# Altium PCB PCB1.PcbDoc (part 1 of 5)
Units mm, origin at the board's own origin, x right, y up, seen from the top; angles counter-clockwise.
Board outline 200 x 110 mm, 4 copper layers (Top Layer, Power Layer, GND Layer, Bottom Layer), stack 1.714 mm thick; 627 components, 400 nets, 2020 pads, 570 vias.
Unrouted connection lines stored in the file: 110.
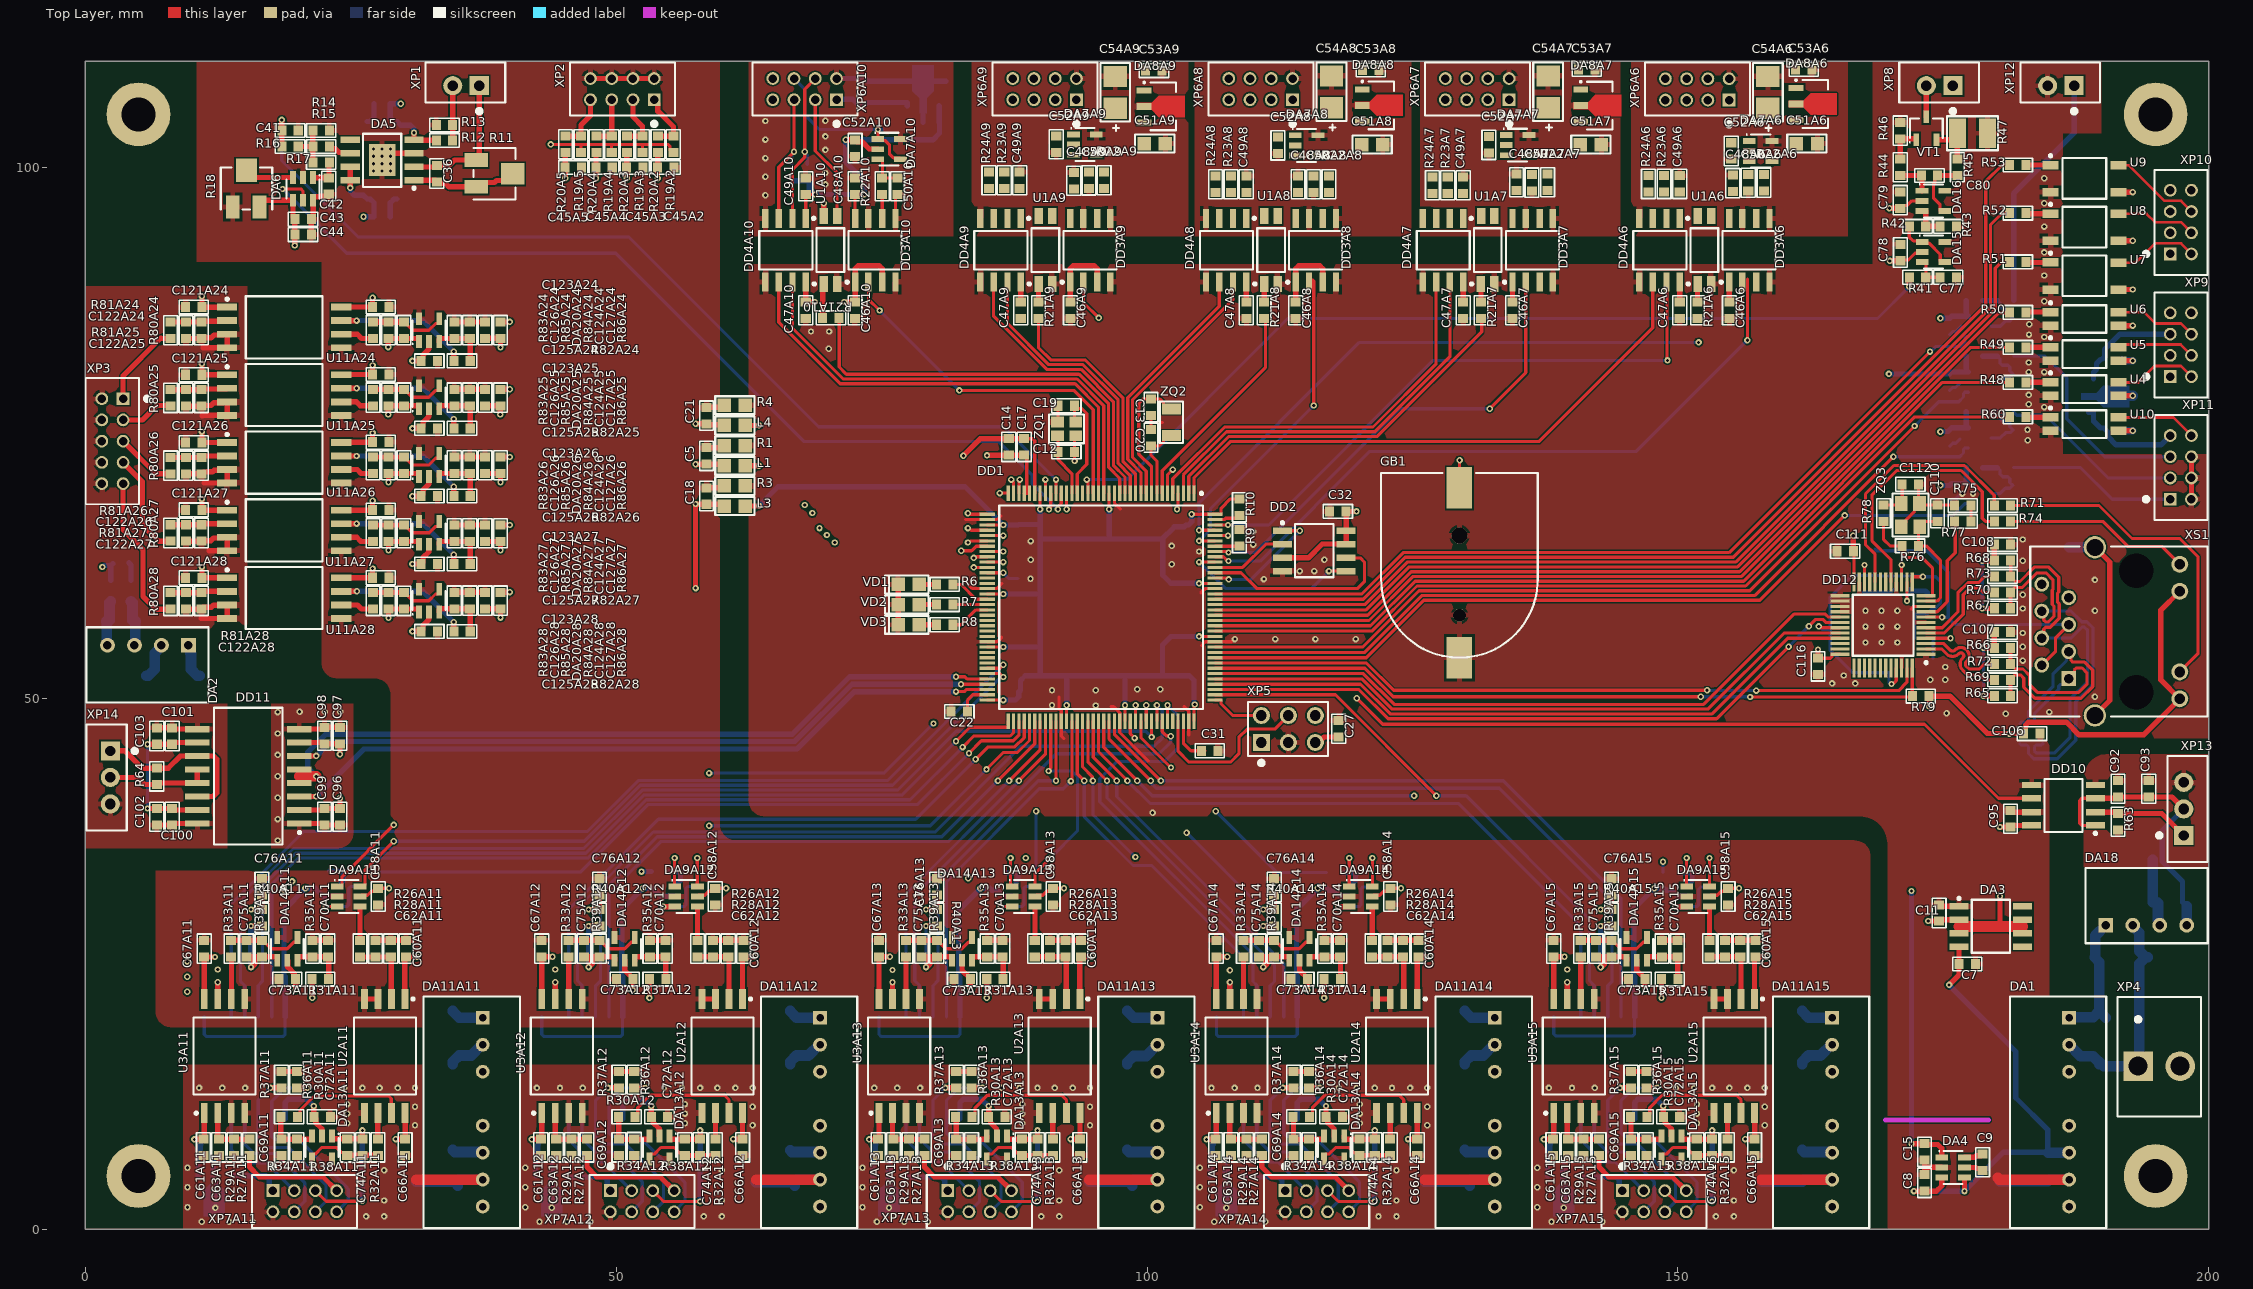
[diagram p0: Top Layer view]
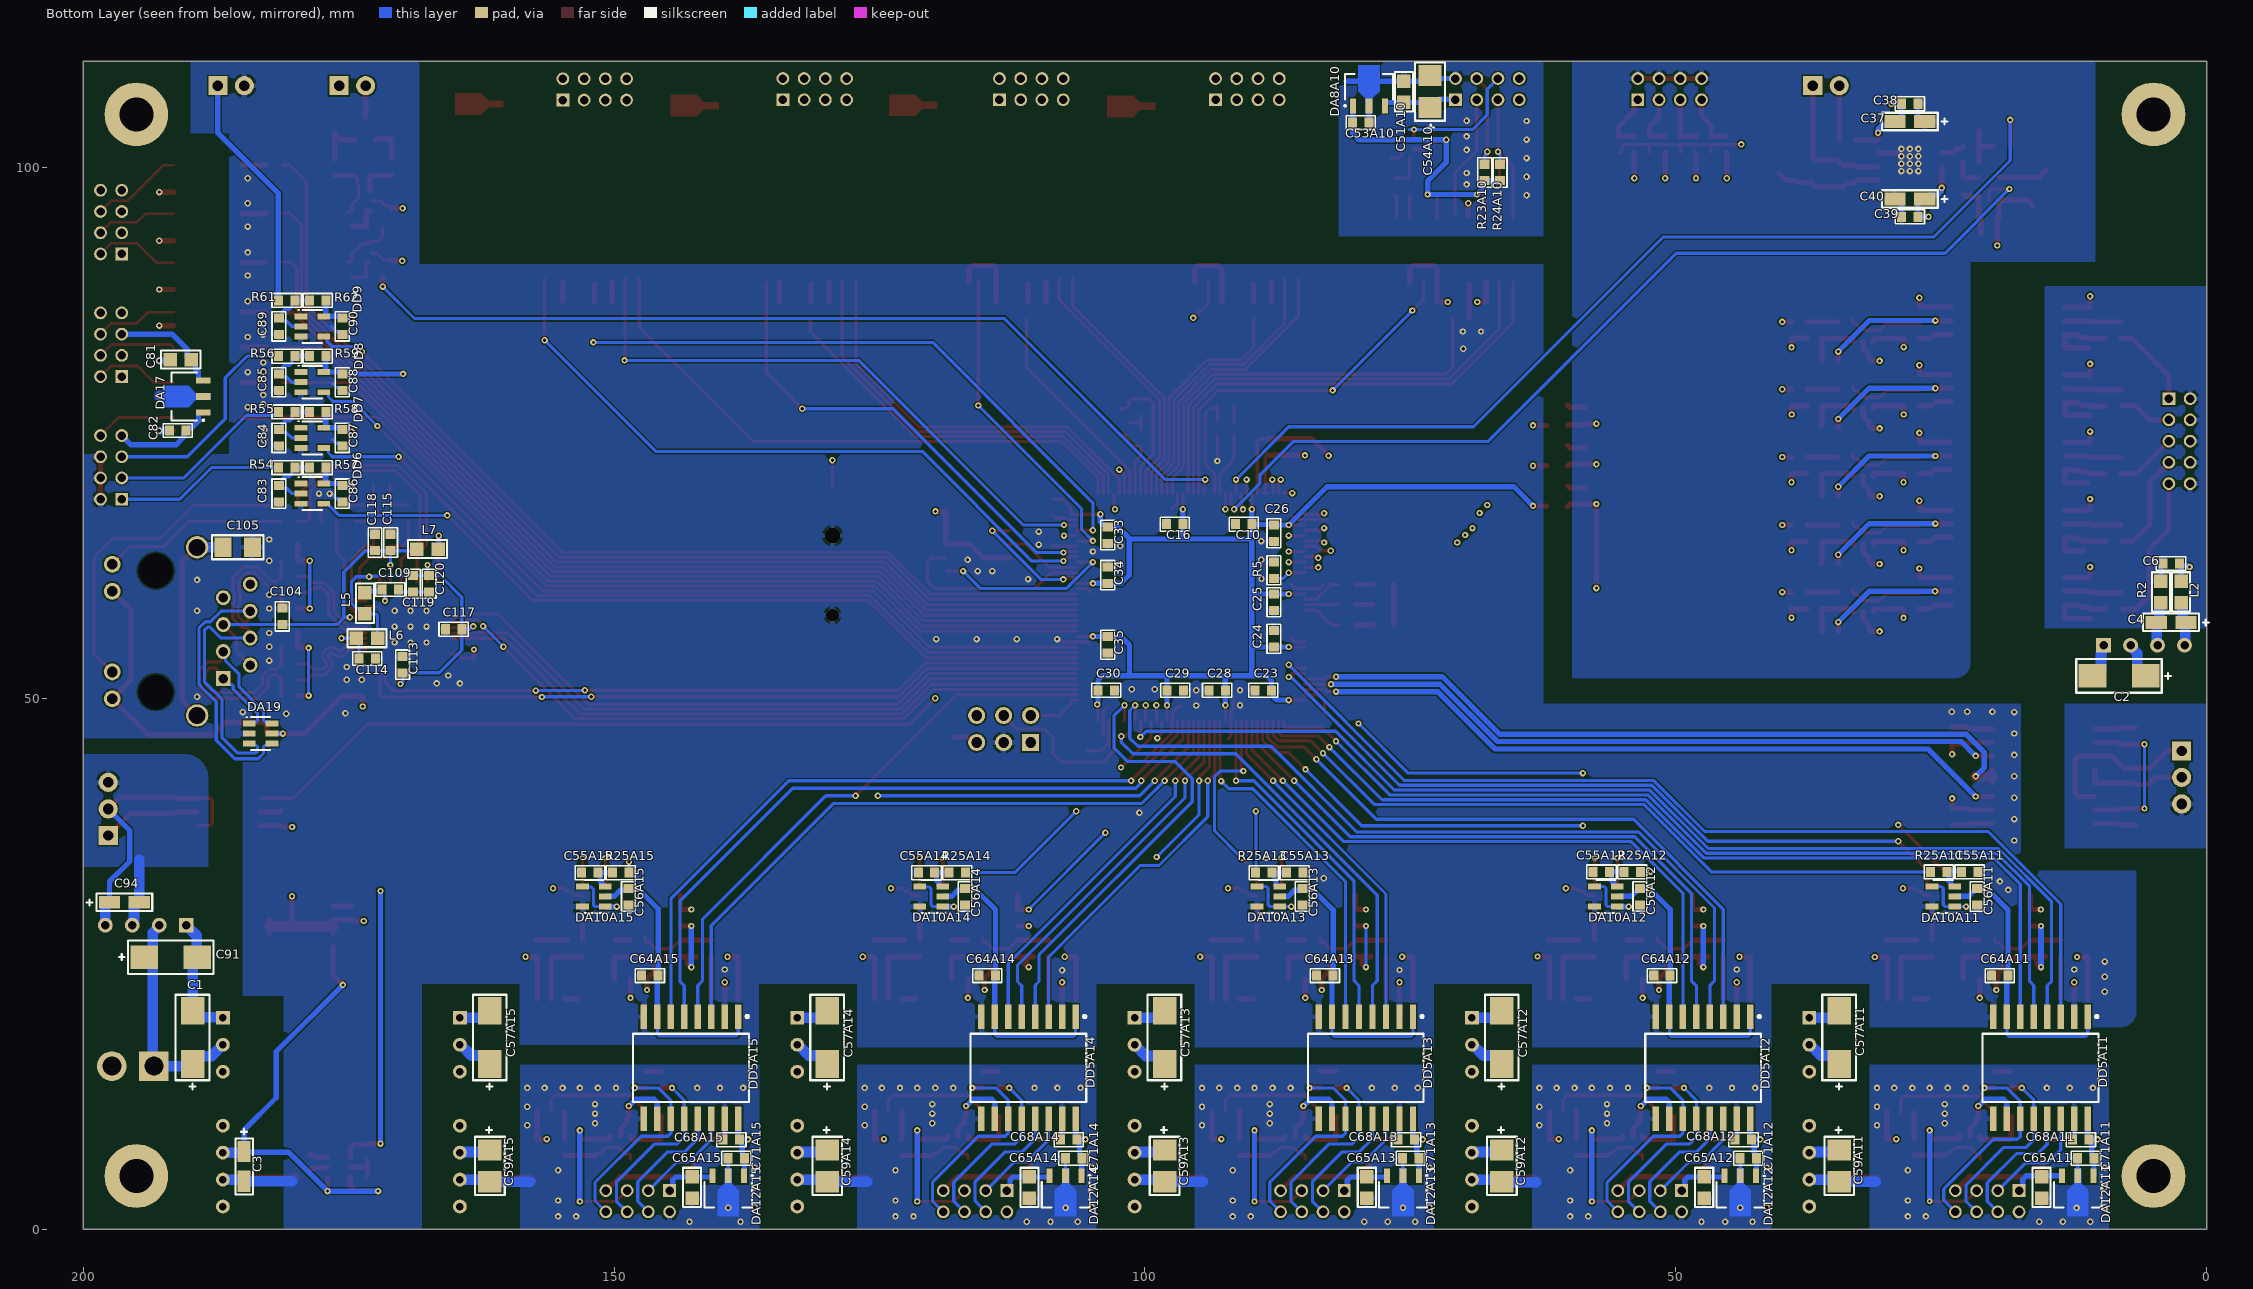
[diagram p1: Bottom Layer view, seen from below]
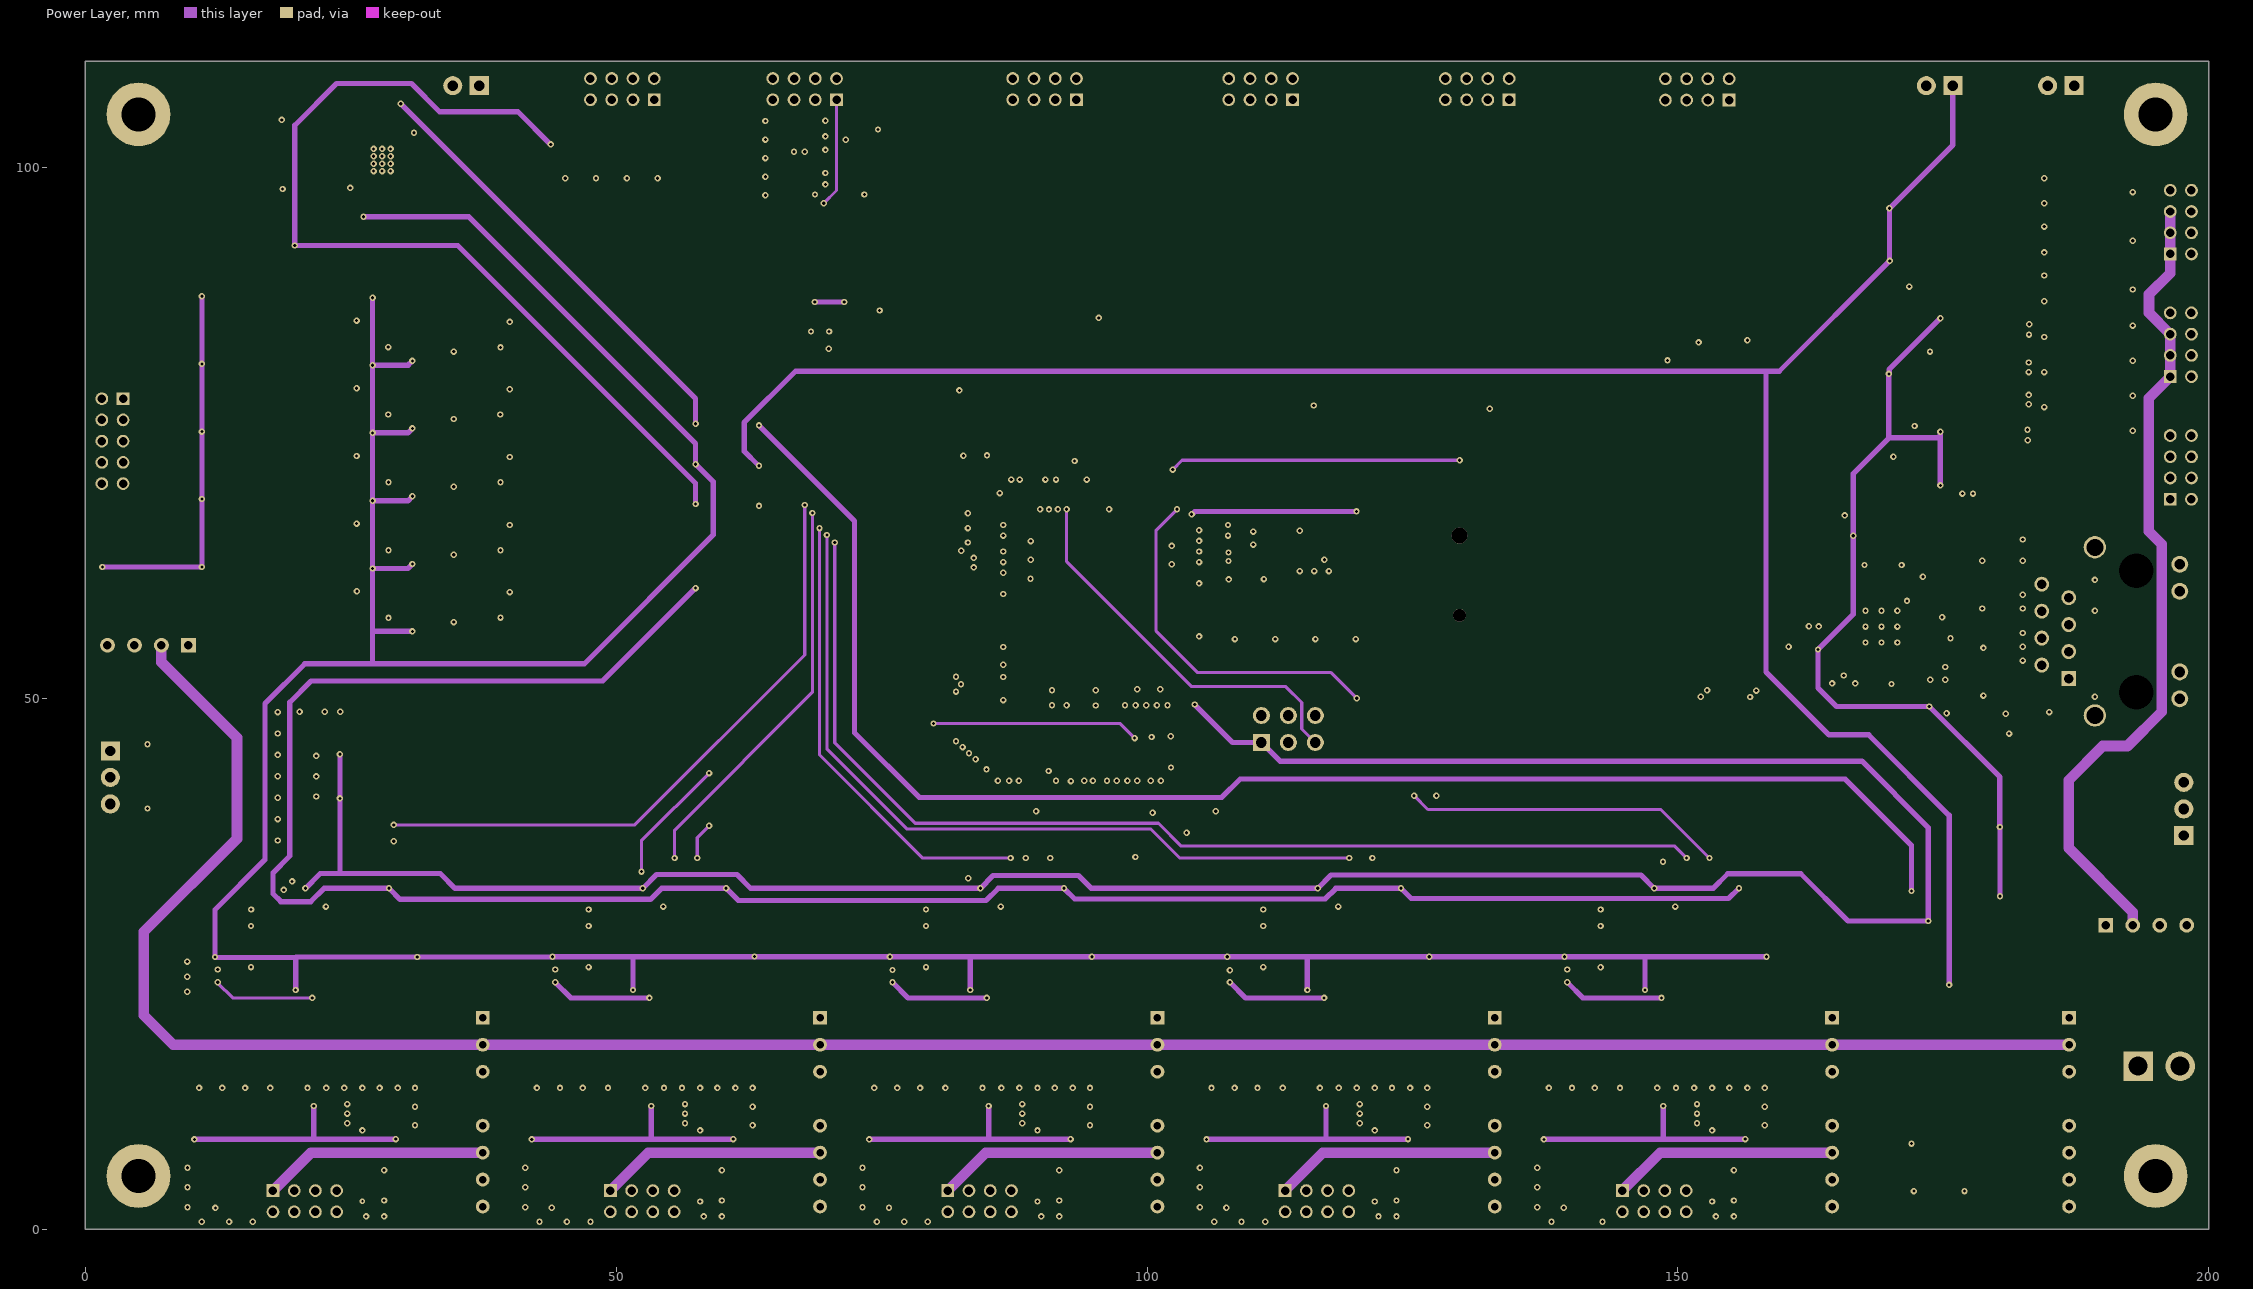
[diagram p2: Power Layer]
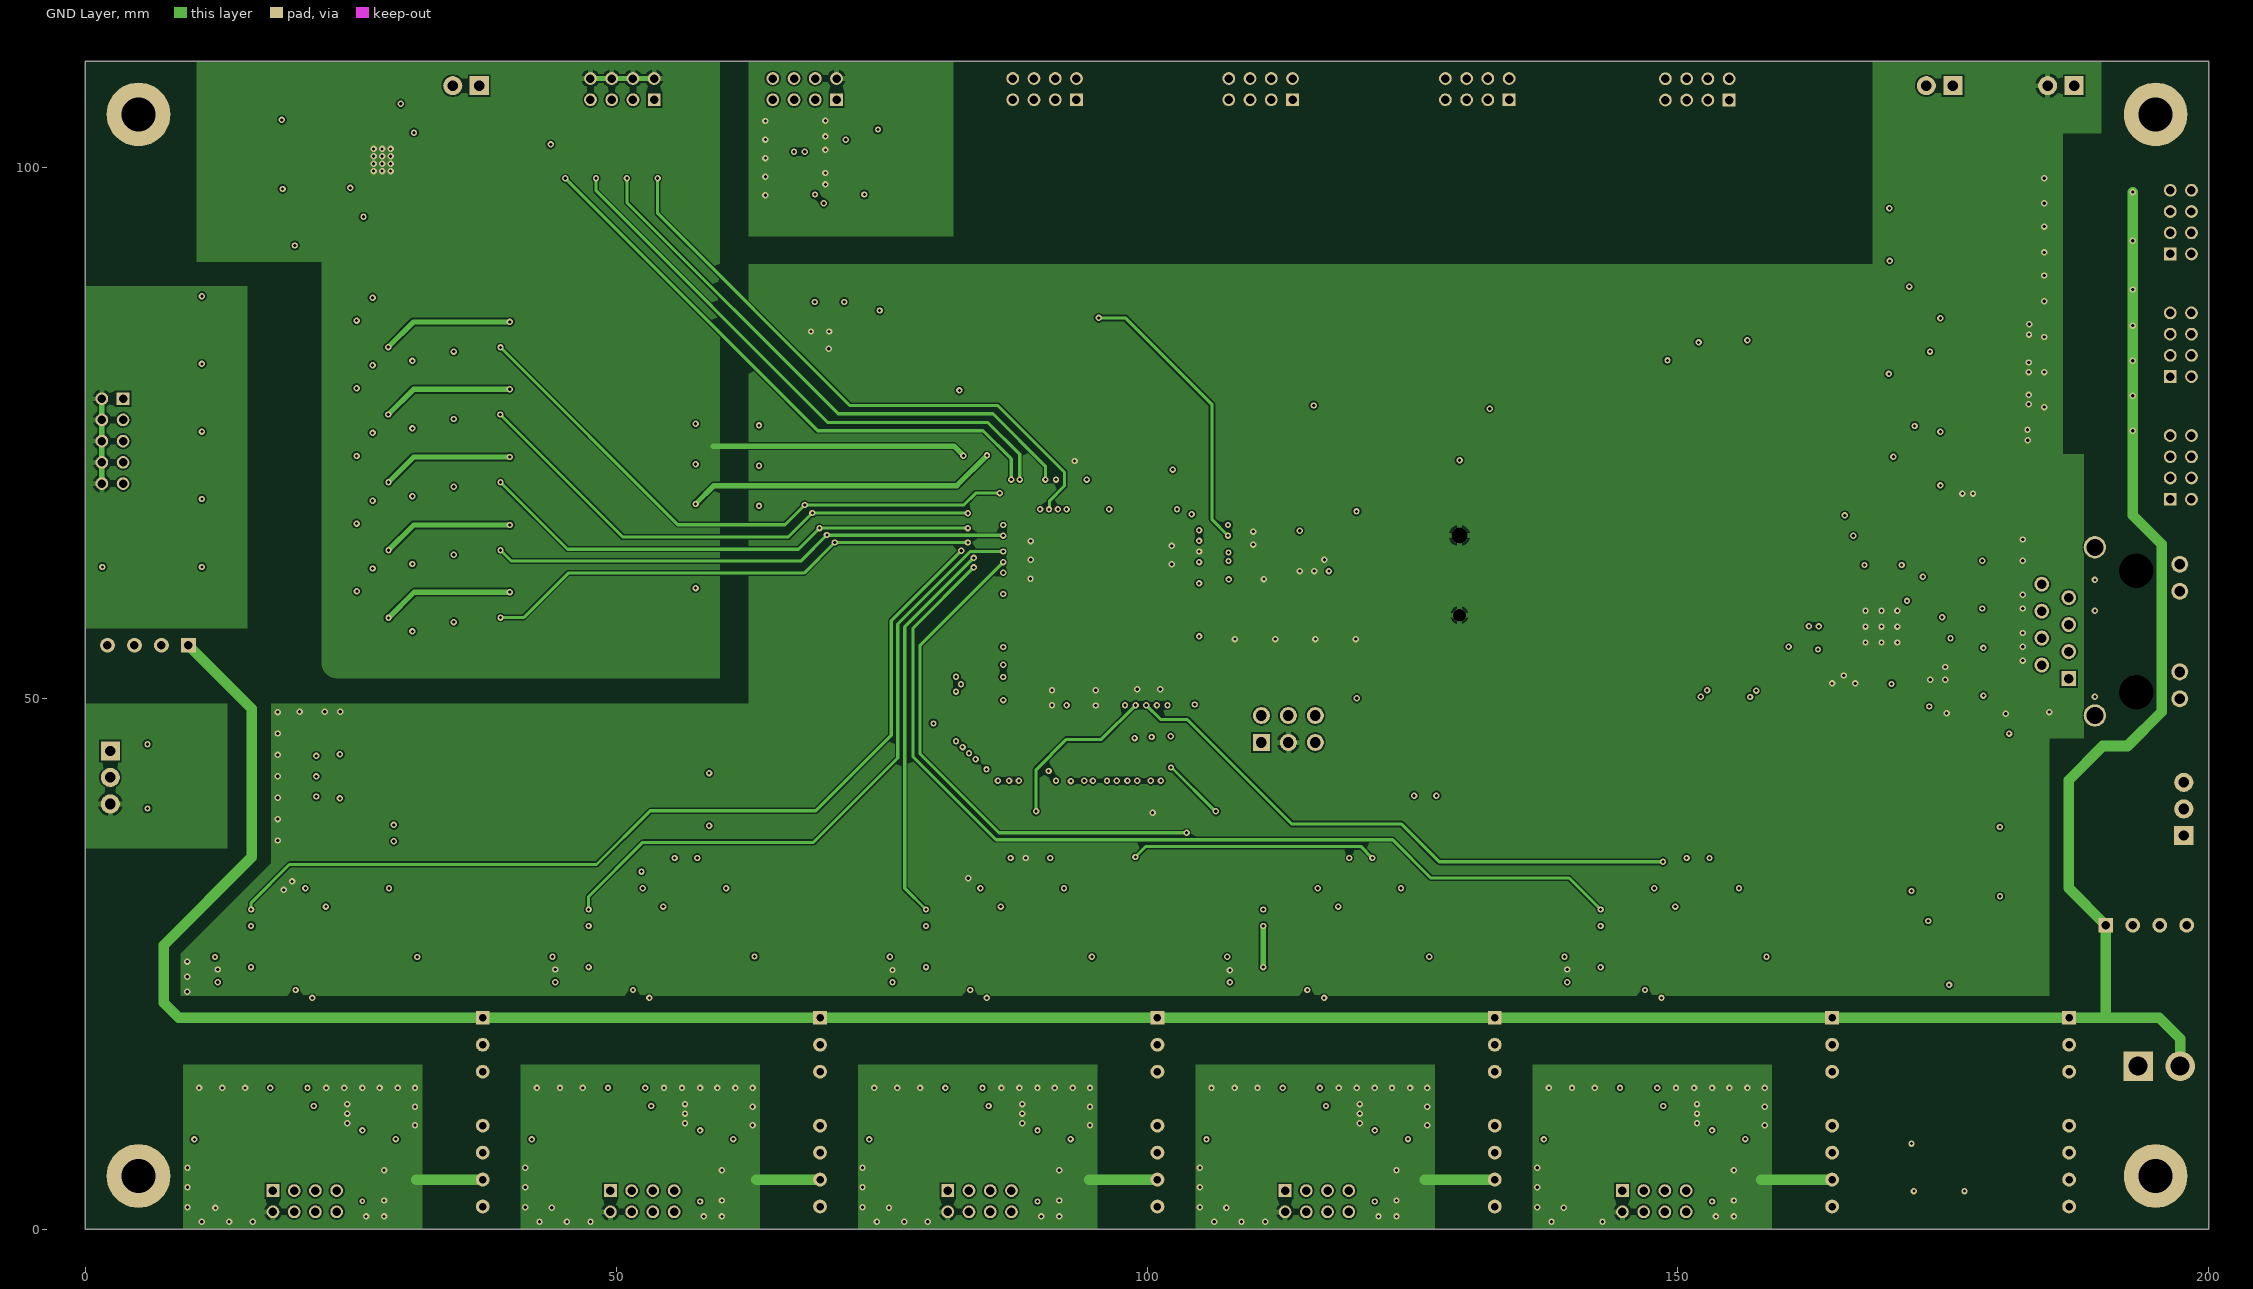
[diagram p3: GND Layer]

## Layer stack, top to bottom
Top Solder: solder mask 0.0102, Solder Resist, Dk 3.5
Top Layer: signal copper 0.018
Dielectric 1: prepreg 0.0711, PP-006, Dk 4.1
Power Layer: signal copper 0.018
Dielectric2: dielectric 1.5, FR-4, Dk 4.8
GND Layer: signal copper 0.018
Dielectric3: prepreg 0.0711, PP-006, Dk 4.1
Bottom Layer: signal copper 0.018
Bottom Solder: solder mask 0.0102, Solder Resist, Dk 3.5

## Board outline
0,0 0,110 200,110 200,0

## Design rules (kind name [scope] priority, off if disabled: settings)
BoardOutlineClearance [(OnLayer('Bottom Layer') AND OnLayer('Top Layer'))] p1: gap=0.2 ignorepadtopadclearanceinfootprint=FALSE
Clearance [All] p1: gap=0.15 ignorepadtopadclearanceinfootprint=TRUE
DiffPairsRouting [All] p1: maxlimit=0.254 minlimit=0.2 mostfreqgap=0.254 toplayer_minwidth=0.3 toplayer_maxwidth=0.381 toplayer_prefwidth=0.381 midlayer1_minwidth=0.3 midlayer1_maxwidth=0.381 midlayer1_prefwidth=0.381 midlayer2_minwidth=0.3 midlayer2_maxwidth=0.381 midlayer2_prefwidth=0.381 bottomlayer_minwidth=0.3 bottomlayer_maxwidth=0.381 bottomlayer_prefwidth=0.381 maxuncoupledlength=12.7
Height [(OnLayer('Bottom Layer'))] p1: minheight=0 maxheight=3 prefheight=3
HoleSize [All] p1: absolutevalues=TRUE maxlimit=10 minlimit=0.2 maxpercent=80.000 minpercent=20.000
MinimumSolderMaskSliver [All] p1: minsoldermaskwidth=0.04
PlaneClearance [All] p1: clearance=0.5
PlaneConnect [All] p1: planeconnectstyle=Relief reliefexpansion=0.5 reliefentries=4 reliefconductorwidth=0.25 reliefairgap=0.25
PolygonConnect [All] p1: thpad.connectstyle=Relief thpad.reliefconductorwidth=0.5 thpad.reliefentries=4 thpad.polygonreliefangle="90 Angle" thpad.airgapwidth=0.25 smdpad.connectstyle=Relief smdpad.reliefconductorwidth=0.5 smdpad.reliefentries=4 smdpad.polygonreliefangle="90 Angle" smdpad.airgapwidth=0.25 via.connectstyle=Direct via.reliefconductorwidth=0.254 via.reliefentries=4 via.polygonreliefangle="90 Angle" via.airgapwidth=0.152
RoutingCorners [All] p1: cornerstyle=Round minsetback=0.254 maxsetback=2.54
RoutingVias [All] p1: holewidth=0.2 width=0.5 viastyle="Through Hole" minholewidth=0.2 minwidth=0.5 maxholewidth=1 maxwidth=1
SilkToSilkClearance [All] p1: silktosilkclearance=0.1
SilkToSolderMaskClearance [IsPad] p1: minsilkscreentomaskgap=0 clearancetoexposedcopper=TRUE
SolderMaskExpansion [All] p1: expansion=0.102 istentingtop=FALSE
Width [All] p1: maxlimit=1 minlimit=0.2 preferedwidth=0.3 minimp=50.000000 maximp=50.000000 favimp=50.000000
21 further rules are at their usual default settings.

## Classes and differential pairs
differential pair class TD: TXO
differential pair class RD: RXI
channel class Thermistor: A2 A3 A4 A5
channel class Power_supply: A6 A7 A8 A9 A10
channel class LD_driver: A11 A12 A13 A14 A15
channel class Analog_isolation: A24 A25 A26 A27 A28
component class Main: C1 C2 C3 C4 C5 C6 C7 C8 C9 C10 C11 C12 C13 C14 C15 C16 C17 C18 C19 C20 C21 C22 C23 C24 C25 C26 C27 C28 C29 C30 C31 C32 C33 C34 C35 DA1 DA2 DA3 DA4 DD1 DD2 GB1 L1 L2 L3 L4 R1 R2 R3 R4 R5 R6 R7 R8 R9 R10 VD1 VD2 VD3 XP1 XP2 XP3 XP4 XP5 ZQ1 ZQ2
component class A28: C122A28 C124A28 C126A28 C127A28 DA20A28 R82A28 R85A28 R86A28 U11A28
component class A27: C121A27 C125A27 C126A27 C127A27 DA20A27 R81A27 R83A27 R85A27 R86A27 U11A27
component class A26: C124A26 C126A26 C127A26 DA20A26 R82A26 R85A26 R86A26 U11A26
component class A25: C121A25 C125A25 C126A25 C127A25 DA20A25 R81A25 R83A25 R85A25 R86A25 U11A25
component class A24: C124A24 C126A24 C127A24 DA20A24 R82A24 R85A24 R86A24 U11A24
component class A23: C104 C106 C109 C112 C115 C117 C120 DA19 DD12 L5 L6 L7 R65 R67 R73 R76 R79 XS1 ZQ3
component class A22: C99 C104 DD11 R65 XP14
component class A21: C92 C95 DA18 DD10 R65 XP13
component class A20: C89 C92 DD9 R61 R65 XP12
component class A19: C81 C85 C89 DA17 DD6 DD7 DD8 R61 U10 XP11
component class A18: R52 R61 U7 U8 U9 XP10
component class A17: R48 R50 U4 U5 U6 XP9
component class A16: C77 C81 DA15 DA16 R42 R46 R48 VT1 XP8
component class A15: C55A15 C56A15 C57A15 C58A15 C59A15 C60A15 C61A15 C62A15 C63A15 C64A15 C65A15 C66A15 C67A15 C68A15 C69A15 C70A15 C71A15 C72A15 C73A15 C74A15 C75A15 C76A15 DA9A15 DA10A15 DA11A15 DA12A15 DA13A15 DA14A15 DD5A15 R25A15 R26A15 R27A15 R28A15 R29A15 R30A15 R31A15 R32A15 R33A15 R34A15 R35A15 R36A15 R37A15 R38A15 R39A15 R40A15 U2A15 U3A15 XP7A15
component class A14: C55A14 C56A14 C57A14 C58A14 C59A14 C60A14 C61A14 C62A14 C63A14 C64A14 C65A14 C66A14 C67A14 C68A14 C69A14 C70A14 C71A14 C72A14 C73A14 C74A14 C75A14 C76A14 DA9A14 DA10A14 DA11A14 DA12A14 DA13A14 DA14A14 DD5A14 R25A14 R26A14 R27A14 R28A14 R29A14 R30A14 R31A14 R32A14 R33A14 R34A14 R35A14 R36A14 R37A14 R38A14 R39A14 R40A14 U2A14 U3A14 XP7A14
component class A13: C55A13 C56A13 C57A13 C58A13 C59A13 C60A13 C61A13 C62A13 C63A13 C64A13 C65A13 C66A13 C67A13 C68A13 C69A13 C70A13 C71A13 C72A13 C73A13 C74A13 C75A13 C76A13 DA9A13 DA10A13 DA11A13 DA12A13 DA13A13 DA14A13 DD5A13 R25A13 R26A13 R27A13 R28A13 R29A13 R30A13 R31A13 R32A13 R33A13 R34A13 R35A13 R36A13 R37A13 R38A13 R39A13 R40A13 U2A13 U3A13 XP7A13
component class A12: C55A12 C56A12 C57A12 C58A12 C59A12 C60A12 C61A12 C62A12 C63A12 C64A12 C65A12 C66A12 C67A12 C68A12 C69A12 C70A12 C71A12 C72A12 C73A12 C74A12 C75A12 C76A12 DA9A12 DA10A12 DA11A12 DA12A12 DA13A12 DA14A12 DD5A12 R25A12 R26A12 R27A12 R28A12 R29A12 R30A12 R31A12 R32A12 R33A12 R34A12 R35A12 R36A12 R37A12 R38A12 R39A12 R40A12 U2A12 U3A12 XP7A12
component class A11: C55A11 C56A11 C57A11 C58A11 C59A11 C60A11 C61A11 C62A11 C63A11 C64A11 C65A11 C66A11 C67A11 C68A11 C69A11 C70A11 C71A11 C72A11 C73A11 C74A11 C75A11 C76A11 DA9A11 DA10A11 DA11A11 DA12A11 DA13A11 DA14A11 DD5A11 R25A11 R26A11 R27A11 R28A11 R29A11 R30A11 R31A11 R32A11 R33A11 R34A11 R35A11 R36A11 R37A11 R38A11 R39A11 R40A11 U2A11 U3A11 XP7A11
component class A10: C46A10 C47A10 C48A10 C49A10 C50A10 C51A10 C52A10 C53A10 C54A10 DA7A10 DA8A10 DD3A10 DD4A10 R21A10 R22A10 R23A10 R24A10 U1A10 XP6A10
component class A9: C46A9 C47A9 C48A9 C49A9 C50A9 C51A9 C52A9 C53A9 C54A9 DA7A9 DA8A9 DD3A9 DD4A9 R21A9 R22A9 R23A9 R24A9 U1A9 XP6A9
component class A8: C46A8 C47A8 C48A8 C49A8 C50A8 C51A8 C52A8 C53A8 C54A8 DA7A8 DA8A8 DD3A8 DD4A8 R21A8 R22A8 R23A8 R24A8 U1A8 XP6A8
component class A7: C46A7 C47A7 C48A7 C49A7 C50A7 C51A7 C52A7 C53A7 C54A7 DA7A7 DA8A7 DD3A7 DD4A7 R21A7 R22A7 R23A7 R24A7 U1A7 XP6A7
component class A6: C46A6 C47A6 C48A6 C49A6 C50A6 C51A6 C52A6 C53A6 C54A6 DA7A6 DA8A6 DD3A6 DD4A6 R21A6 R22A6 R23A6 R24A6 U1A6 XP6A6
component class A5: C45A5 R19A5 R20A5
component class A4: C45A4 R19A4 R20A4
component class A3: C45A3 R19A3 R20A3
component class A2: C45A2 R19A2 R20A2
component class A1: C36 C37 C38 C39 C40 C41 C42 C43 C44 DA5 DA6 R11 R12 R13 R14 R15 R16 R17 R18
differential pair TXO: +TXO_P -TXO_N
differential pair TD: +TD_P -TD_N
differential pair RXI: +RXI_P -RXI_N
differential pair RD: +RD_P -RD_N

## Components (designator, comment, footprint, x,y, rotation, side; value= is the part's Value field where it differs from the comment)
C1 "10мкФх35B" CAP_C 189.7,15.55 r90 bottom locked
C2 "10мкФх35B" CAP_C 5.75,52.119 r0 bottom
C3 "10мкФх10B" CAP_A 184.85,7.3 r270 bottom
C4 "10мкФх10B" CAP_A 1.95,57.144 r0 bottom
C5 "0,1мкФ" CAP_0603 58.5,72.025 r90 top
C6 "0,1мкФ" CAP_0603 2.55,62.694 r0 bottom
C7 "0,1мкФ" CAP_0603 178.05,24.975 r180 top
C8 "10мкФ" CAP_0603 173.225,3.55 r90 top
C9 "1мкФ" CAP_0603 178.7,5.5 r90 top
C10 "0,1мкФ" CAP_0603 89.9,66.4 r0 bottom
C11 "10мкФ" CAP_0603 174.6,28.975 r90 top
C12 "8пФ" CAP_0603 91.6,73.2 r0 top
C13 "18пФ" CAP_0603 100.375,78.225 r270 top
C14 "0,1мкФ" CAP_0603 86.975,74.475 r270 top
C15 "10мкФ" CAP_0603 173.225,8.075 r270 top
C16 "0,1мкФ" CAP_0603 98,66.4 r180 bottom
C17 "0,1мкФ" CAP_0603 88.425,74.475 r270 top
C18 "0,1мкФ" CAP_0603 58.5,68.25 r90 top
C19 "8пФ" CAP_0603 93.2,77.55 r180 top
C20 "18пФ" CAP_0603 100.375,73.75 r90 top
C21 "0,1мкФ" CAP_0603 58.5,75.825 r90 top
C22 "2,2мкФ" CAP_0603 83.125,48.75 r180 top
C23 "0,1мкФ" CAP_0603 89.65,50.75 r180 bottom
C24 "0,1мкФ" CAP_0603 87.85,54.8 r90 bottom
C25 "0,1мкФ" CAP_0603 87.85,59.85 r270 bottom
C26 "0,1мкФ" CAP_0603 87.85,66.35 r270 bottom
C27 "0,1мкФ" CAP_0603 118.05,46.325 r90 top
C28 "0,1мкФ" CAP_0603 94,50.75 r180 bottom
C29 "0,1мкФ" CAP_0603 96.35,50.75 r0 bottom
C30 "0,1мкФ" CAP_0603 102.85,50.75 r0 bottom
C31 "2,2мкФ" CAP_0603 105.1,45.05 r0 top
C32 "0,1мкФ" CAP_0603 118.775,67.6 r180 top
C33 "0,1мкФ" CAP_0603 103.5,64.575 r90 bottom
C34 "0,1мкФ" CAP_0603 103.5,60.8 r90 bottom
C35 "0,1мкФ" CAP_0603 103.5,55.85 r270 bottom
C36 "22пФ" CAP_0603 33.1,98.625 r90 top
C37 "10мкФх10B" CAP_A 26.55,104.325 r0 bottom
C38 "0,1мкФ" CAP_0603 28.75,106 r180 bottom
C39 "0,1мкФ" CAP_0603 27.15,95.35 r0 bottom
C40 "10мкФх10B" CAP_A 26.55,97.025 r0 bottom
C41 "0,1мкФ" CAP_0603 18.475,103.475 r0 top
C42 "22пФ" CAP_0603 22.925,99.05 r270 top
C43 "0,1мкФ" CAP_0603 19.7,95.125 r0 top
C44 "2,2мкФ" CAP_0603 19.7,93.675 r0 top
C45A2 "0,1мкФ" CAP_0603 53.85,100 r0 top (schematic designator C45)
C45A3 "0,1мкФ" CAP_0603 50.95,100 r0 top (schematic designator C45)
C45A4 "0,1мкФ" CAP_0603 48.05,100 r0 top (schematic designator C45)
C45A5 "0,1мкФ" CAP_0603 45.15,100 r0 top (schematic designator C45)
C46A6 "0,1мкФ" CAP_0603 154.85,87.35 r270 top (schematic designator C46)
C46A7 "0,1мкФ" CAP_0603 134.425,87.35 r270 top (schematic designator C46)
C46A8 "0,1мкФ" CAP_0603 114,87.35 r270 top (schematic designator C46)
C46A9 "0,1мкФ" CAP_0603 92.775,87.35 r270 top (schematic designator C46)
C46A10 "0,1мкФ" CAP_0603 72.5,87.35 r270 top (schematic designator C46)
C47A6 "0,1мкФ" CAP_0603 150.175,87.35 r270 top (schematic designator C47)
C47A7 "0,1мкФ" CAP_0603 129.775,87.35 r270 top (schematic designator C47)
C47A8 "0,1мкФ" CAP_0603 109.35,87.35 r270 top (schematic designator C47)
C47A9 "0,1мкФ" CAP_0603 88.1,87.35 r270 top (schematic designator C47)
C47A10 "0,1мкФ" CAP_0603 67.85,87.35 r270 top (schematic designator C47)
C48A6 "0,1мкФ" CAP_0603 155.175,97.725 r90 top (schematic designator C48)
C48A7 "0,1мкФ" CAP_0603 134.8,97.8 r90 top (schematic designator C48)
C48A8 "0,1мкФ" CAP_0603 114.225,97.625 r90 top (schematic designator C48)
C48A9 "0,1мкФ" CAP_0603 93.1,97.95 r90 top (schematic designator C48)
C48A10 "0,1мкФ" CAP_0603 72.5,97.425 r90 top (schematic designator C48)
C49A6 "0,1мкФ" CAP_0603 150.175,97.65 r90 top (schematic designator C49)
C49A7 "0,1мкФ" CAP_0603 129.775,97.525 r90 top (schematic designator C49)
C49A8 "0,1мкФ" CAP_0603 109.35,97.625 r90 top (schematic designator C49)
C49A9 "0,1мкФ" CAP_0603 88,98 r90 top (schematic designator C49)
C49A10 "0,1мкФ" CAP_0603 67.85,97.425 r90 top (schematic designator C49)
C50A6 "1мкФ" CAP_0603 156.625,99.35 r270 top (schematic designator C50)
C50A7 "1мкФ" CAP_0603 136.25,99.375 r270 top (schematic designator C50)
C50A8 "1мкФ" CAP_0603 115.675,99.225 r270 top (schematic designator C50)
C50A9 "1мкФ" CAP_0603 94.525,99.575 r270 top (schematic designator C50)
C50A10 "1мкФ" CAP_0603 76.5,99.025 r270 top (schematic designator C50)
C51A6 "0,33мкФ" CAP_0805 163.15,102.25 r180 top (schematic designator C51)
C51A7 "0,33мкФ" CAP_0805 142.8,102.15 r180 top (schematic designator C51)
C51A8 "0,33мкФ" CAP_0805 122.2,102.15 r180 top (schematic designator C51)
C51A9 "0,33мкФ" CAP_0805 101.725,102.25 r180 top (schematic designator C51)
C51A10 "0,33мкФ" CAP_0805 75.6,108.125 r270 bottom (schematic designator C51)
C52A6 "0,1мкФ" CAP_0603 155.025,102.35 r270 top (schematic designator C52)
C52A7 "0,1мкФ" CAP_0603 132.2,102.925 r270 top (schematic designator C52)
C52A8 "0,1мкФ" CAP_0603 112.325,102.875 r270 top (schematic designator C52)
C52A9 "0,1мкФ" CAP_0603 91.45,102.975 r270 top (schematic designator C52)
C52A10 "0,1мкФ" CAP_0603 72.5,102.625 r270 top (schematic designator C52)
C53A6 "0,1мкФ" CAP_0603 161.05,109.225 r0 top (schematic designator C53)
C53A7 "0,1мкФ" CAP_0603 140.625,109.225 r0 top (schematic designator C53)
C53A8 "0,1мкФ" CAP_0603 120.275,109.175 r0 top (schematic designator C53)
C53A9 "0,1мкФ" CAP_0603 99.85,109.125 r0 top (schematic designator C53)
C53A10 "0,1мкФ" CAP_0603 80.475,104.225 r180 bottom (schematic designator C53)
C54A6 "10мкФх25B" CAP_B 158.475,105.575 r90 top (schematic designator C54)
C54A7 "10мкФх25B" CAP_B 137.775,105.625 r90 top (schematic designator C54)
C54A8 "10мкФх25B" CAP_B 117.375,105.625 r90 top (schematic designator C54)
C54A9 "10мкФх25B" CAP_B 97,105.575 r90 top (schematic designator C54)
C54A10 "10мкФх25B" CAP_B 73.15,105.65 r90 bottom (schematic designator C54)
C55A11 "10нФ" CAP_0603 23.125,33.65 r180 bottom (schematic designator C55)
C55A12 "10нФ" CAP_0603 56.2,33.65 r0 bottom (schematic designator C55)
C55A13 "10нФ" CAP_0603 86.7,33.575 r180 bottom (schematic designator C55)
C55A14 "10нФ" CAP_0603 119.775,33.575 r0 bottom (schematic designator C55)
C55A15 "10нФ" CAP_0603 151.475,33.575 r0 bottom (schematic designator C55)
C56A11 "0,1мкФ" CAP_0603 21.6,32.125 r270 bottom (schematic designator C56)
C56A12 "0,1мкФ" CAP_0603 53.375,32.125 r270 bottom (schematic designator C56)
C56A13 "0,1мкФ" CAP_0603 85.175,32.125 r270 bottom (schematic designator C56)
C56A14 "0,1мкФ" CAP_0603 116.95,32.125 r270 bottom (schematic designator C56)
C56A15 "0,1мкФ" CAP_0603 148.65,32.125 r270 bottom (schematic designator C56)
C57A11 "10мкФх35B" CAP_C 34.6,15.55 r90 bottom (schematic designator C57)
C57A12 "10мкФх35B" CAP_C 66.375,15.55 r90 bottom locked (schematic designator C57)
C57A13 "10мкФх35B" CAP_C 98.15,15.55 r90 bottom locked (schematic designator C57)
C57A14 "10мкФх35B" CAP_C 129.925,15.55 r90 bottom locked (schematic designator C57)
C57A15 "10мкФх35B" CAP_C 161.7,15.55 r90 bottom locked (schematic designator C57)
C58A11 "0,1мкФ" CAP_0603 27.575,32.125 r270 top (schematic designator C58)
C58A12 "0,1мкФ" CAP_0603 59.325,32.125 r270 top (schematic designator C58)
C58A13 "0,1мкФ" CAP_0603 91.15,32.125 r270 top (schematic designator C58)
C58A14 "0,1мкФ" CAP_0603 122.925,32.125 r270 top (schematic designator C58)
C58A15 "0,1мкФ" CAP_0603 154.725,32.125 r270 top (schematic designator C58)
C59A11 "10мкФх25B" CAP_B 34.6,7.45 r270 bottom locked (schematic designator C59)
C59A12 "10мкФх25B" CAP_B 66.375,7.45 r270 bottom locked (schematic designator C59)
C59A13 "10мкФх25B" CAP_B 98.15,7.45 r270 bottom locked (schematic designator C59)
C59A14 "10мкФх25B" CAP_B 129.925,7.45 r270 bottom locked (schematic designator C59)
C59A15 "10мкФх25B" CAP_B 161.7,7.45 r270 bottom locked (schematic designator C59)
C60A11 "0,1мкФ" CAP_0603 30.215,25.625 r90 top (schematic designator C60)
C60A12 "0,1мкФ" CAP_0603 62,25.625 r90 top (schematic designator C60)
C60A13 "0,1мкФ" CAP_0603 93.775,25.625 r90 top (schematic designator C60)
C60A14 "0,1мкФ" CAP_0603 125.55,25.625 r90 top (schematic designator C60)
C60A15 "0,1мкФ" CAP_0603 157.325,25.625 r90 top (schematic designator C60)
C61A11 "0,1мкФ" CAP_0603 11.115,8.5 r270 top (schematic designator C61)
C61A12 "0,1мкФ" CAP_0603 42.9,8.5 r270 top (schematic designator C61)
C61A13 "0,1мкФ" CAP_0603 74.675,8.5 r270 top (schematic designator C61)
C61A14 "0,1мкФ" CAP_0603 106.45,8.5 r270 top (schematic designator C61)
C61A15 "0,1мкФ" CAP_0603 138.225,8.5 r270 top (schematic designator C61)
C62A11 "100пФ" CAP_0603 28.765,27.225 r270 top (schematic designator C62)
C62A12 "100пФ" CAP_0603 60.55,27.225 r270 top (schematic designator C62)
C62A13 "100пФ" CAP_0603 92.325,27.225 r270 top (schematic designator C62)
C62A14 "100пФ" CAP_0603 124.1,27.225 r270 top (schematic designator C62)
C62A15 "100пФ" CAP_0603 155.875,27.225 r270 top (schematic designator C62)
C63A11 "100пФ" CAP_0603 12.565,6.9 r90 top (schematic designator C63)
C63A12 "100пФ" CAP_0603 44.35,6.9 r90 top (schematic designator C63)
C63A13 "100пФ" CAP_0603 76.125,6.9 r90 top (schematic designator C63)
C63A14 "100пФ" CAP_0603 107.9,6.9 r90 top (schematic designator C63)
C63A15 "100пФ" CAP_0603 139.675,6.9 r90 top (schematic designator C63)
C64A11 "0,1мкФ" CAP_0603 18.675,23.875 r0 bottom (schematic designator C64)
C64A12 "0,1мкФ" CAP_0603 50.5,23.875 r0 bottom (schematic designator C64)
C64A13 "0,1мкФ" CAP_0603 82.25,23.875 r0 bottom (schematic designator C64)
C64A14 "0,1мкФ" CAP_0603 114.05,23.875 r0 bottom (schematic designator C64)
C64A15 "0,1мкФ" CAP_0603 145.825,23.875 r0 bottom (schematic designator C64)
C65A11 "0,33мкФ" CAP_0805 15.54,2.925 r90 bottom (schematic designator C65)
C65A12 "0,33мкФ" CAP_0805 47.325,2.925 r90 bottom (schematic designator C65)
C65A13 "0,33мкФ" CAP_0805 79.1,2.925 r90 bottom (schematic designator C65)
C65A14 "0,33мкФ" CAP_0805 110.875,2.925 r90 bottom (schematic designator C65)
C65A15 "0,33мкФ" CAP_0805 142.65,2.925 r90 bottom (schematic designator C65)
C66A11 "0,1мкФ" CAP_0603 30.115,8.5 r270 top (schematic designator C66)
C66A12 "0,1мкФ" CAP_0603 61.9,8.5 r270 top (schematic designator C66)
C66A13 "0,1мкФ" CAP_0603 93.675,8.5 r270 top (schematic designator C66)
C66A14 "0,1мкФ" CAP_0603 125.45,8.5 r270 top (schematic designator C66)
C66A15 "0,1мкФ" CAP_0603 157.225,8.5 r270 top (schematic designator C66)
C67A11 "0,1мкФ" CAP_0603 11.19,25.625 r90 top (schematic designator C67)
C67A12 "0,1мкФ" CAP_0603 42.975,25.625 r90 top (schematic designator C67)
C67A13 "0,1мкФ" CAP_0603 74.75,25.625 r90 top (schematic designator C67)
C67A14 "0,1мкФ" CAP_0603 106.525,25.625 r90 top (schematic designator C67)
C67A15 "0,1мкФ" CAP_0603 138.3,25.625 r90 top (schematic designator C67)
C68A11 "0,1мкФ" CAP_0603 11.04,8.425 r0 bottom (schematic designator C68)
C68A12 "0,1мкФ" CAP_0603 42.825,8.425 r0 bottom (schematic designator C68)
C68A13 "0,1мкФ" CAP_0603 74.6,8.425 r0 bottom (schematic designator C68)
C68A14 "0,1мкФ" CAP_0603 106.375,8.425 r0 bottom (schematic designator C68)
C68A15 "0,1мкФ" CAP_0603 138.15,8.425 r0 bottom (schematic designator C68)
C69A11 "100пФ" CAP_0603 18.465,8.5 r270 top (schematic designator C69)
C69A12 "100пФ" CAP_0603 50.25,8.5 r270 top (schematic designator C69)
C69A13 "100пФ" CAP_0603 82.025,8.5 r270 top (schematic designator C69)
C69A14 "100пФ" CAP_0603 113.8,8.5 r270 top (schematic designator C69)
C69A15 "100пФ" CAP_0603 145.575,8.5 r270 top (schematic designator C69)
C70A11 "100пФ" CAP_0603 22.84,25.625 r90 top (schematic designator C70)
C70A12 "100пФ" CAP_0603 54.625,25.625 r90 top (schematic designator C70)
C70A13 "100пФ" CAP_0603 86.4,25.625 r90 top (schematic designator C70)
C70A14 "100пФ" CAP_0603 118.175,25.625 r90 top (schematic designator C70)
C70A15 "100пФ" CAP_0603 149.95,25.625 r90 top (schematic designator C70)
C71A11 "0,1мкФ" CAP_0603 10.59,6.675 r0 bottom (schematic designator C71)
C71A12 "0,1мкФ" CAP_0603 42.375,6.675 r0 bottom (schematic designator C71)
C71A13 "0,1мкФ" CAP_0603 74.15,6.675 r0 bottom (schematic designator C71)
C71A14 "0,1мкФ" CAP_0603 105.925,6.675 r0 bottom (schematic designator C71)
C71A15 "0,1мкФ" CAP_0603 137.7,6.675 r0 bottom (schematic designator C71)
C72A11 "0,1мкФ" CAP_0603 21.49,10.575 r0 top (schematic designator C72)
C72A12 "0,1мкФ" CAP_0603 53.275,10.575 r0 top (schematic designator C72)
C72A13 "0,1мкФ" CAP_0603 85.05,10.575 r0 top (schematic designator C72)
C72A14 "0,1мкФ" CAP_0603 116.825,10.575 r0 top (schematic designator C72)
C72A15 "0,1мкФ" CAP_0603 148.6,10.575 r0 top (schematic designator C72)
C73A11 "0,1мкФ" CAP_0603 19.815,23.55 r180 top (schematic designator C73)
C73A12 "0,1мкФ" CAP_0603 51.6,23.55 r180 top (schematic designator C73)
C73A13 "0,1мкФ" CAP_0603 83.375,23.55 r180 top (schematic designator C73)
C73A14 "0,1мкФ" CAP_0603 115.15,23.55 r180 top (schematic designator C73)
C73A15 "0,1мкФ" CAP_0603 146.925,23.55 r180 top (schematic designator C73)
C74A11 "100пФ" CAP_0603 26.115,6.9 r90 top (schematic designator C74)
C74A12 "100пФ" CAP_0603 57.9,6.9 r90 top (schematic designator C74)
C74A13 "100пФ" CAP_0603 89.675,6.9 r90 top (schematic designator C74)
C74A14 "100пФ" CAP_0603 121.45,6.9 r90 top (schematic designator C74)
C74A15 "100пФ" CAP_0603 153.225,6.9 r90 top (schematic designator C74)
C75A11 "100пФ" CAP_0603 15.181,27.225 r270 top (schematic designator C75)
C75A12 "100пФ" CAP_0603 46.966,27.225 r270 top (schematic designator C75)
C75A13 "100пФ" CAP_0603 78.75,27.225 r270 top (schematic designator C75)
C75A14 "100пФ" CAP_0603 110.525,27.225 r270 top (schematic designator C75)
C75A15 "100пФ" CAP_0603 142.3,27.225 r270 top (schematic designator C75)
C76A11 "0,1мкФ" CAP_0603 16.625,31.425 r90 top (schematic designator C76)
C76A12 "0,1мкФ" CAP_0603 48.425,31.425 r90 top (schematic designator C76)
C76A13 "0,1мкФ" CAP_0603 80.2,31.425 r90 top (schematic designator C76)
C76A14 "0,1мкФ" CAP_0603 111.975,31.425 r90 top (schematic designator C76)
C76A15 "0,1мкФ" CAP_0603 143.75,31.425 r90 top (schematic designator C76)
C77 "1мкФ" CAP_0603 174.671,89.65 r0 top
C78 "0,1мкФ" CAP_0603 170.959,91.187 r90 top
C79 "0,1мкФ" CAP_0603 170.946,96.125 r90 top
C80 "100пФ" CAP_0603 172.9,99.243 r0 top
C81 "0,33мкФ" CAP_0805 191.815,81.9 r180 bottom
C82 "0,1мкФ" CAP_0603 190.3,75.225 r0 bottom
C83 "1мкФ" CAP_0603 181.575,70.075 r270 bottom
C84 "1мкФ" CAP_0603 181.575,75.325 r270 bottom
C85 "1мкФ" CAP_0603 181.575,80.575 r270 bottom
C86 "0,1мкФ" CAP_0603 175.6,70.075 r270 bottom
C87 "0,1мкФ" CAP_0603 175.6,75.325 r270 bottom
C88 "0,1мкФ" CAP_0603 175.6,80.575 r270 bottom
C89 "1мкФ" CAP_0603 181.575,85.825 r270 bottom
C90 "0,1мкФ" CAP_0603 175.6,85.825 r270 bottom
C91 "10мкФх35B" CAP_C 194.25,25.6 r180 bottom locked
C92 "0,1мкФ" CAP_0603 191.45,40.675 r90 top locked
C93 "0,1мкФ" CAP_0603 194.35,40.675 r90 top locked
C94 "10мкФх10B" CAP_A 197.525,30.775 r180 bottom locked
C95 "0,1мкФ" CAP_0603 181.325,37.85 r90 top locked
C96 "0,1мкФ" CAP_0603 23.975,39.644 r270 top
C97 "10мкФ" CAP_0603 23.975,45.669 r90 top
C98 "0,1мкФ" CAP_0603 22.525,45.669 r90 top
C99 "0,01мкФ" CAP_0603 22.525,38.044 r90 top
C100 "0,01мкФ" CAP_0603 8.175,38.044 r90 top
C101 "0,1мкФ" CAP_0603 8.175,45.644 r90 top
C102 "0,1мкФ" CAP_0603 6.725,39.644 r270 top
C103 "10мкФ" CAP_0603 6.725,45.644 r90 top
C104 "0,1мкФ" CAP_0603 181.254,56.912 r90 bottom
C105 "1нФх2кВ" CAP_1206 186.85,64.225 r180 bottom
C106 "0,1мкФ" CAP_0603 182.55,46.675 r0 top
C107 "0,1мкФ" CAP_0603 179.775,56.229 r0 top
C108 "0,1мкФ" CAP_0603 179.775,64.475 r0 top
C109 "0,1мкФ" CAP_0603 171.9,60.25 r180 bottom
C110 "8пФ" CAP_0603 174.45,66.626 r90 top
C111 "0,1мкФ" CAP_0603 166.55,63.85 r180 top
C112 "8пФ" CAP_0603 171.1,70.15 r0 top
C113 "0,1мкФ" CAP_0603 169.925,52.375 r90 bottom
C114 "0,1мкФ" CAP_0603 174.05,53.75 r180 bottom
C115 "0,1мкФ" CAP_0603 171.05,63.875 r90 bottom
C116 "0,1мкФ" CAP_0603 163.2,53.8 r270 top
C117 "0,1мкФ" CAP_0603 164.32,56.5 r0 bottom
C118 "0,1мкФ" CAP_0603 172.517,63.875 r90 bottom
C119 "0,1мкФ" CAP_0603 168.925,61.586 r270 bottom
C120 "0,1мкФ" CAP_0603 167.425,61.586 r270 bottom
C121A24 "0,1мкФ" CAP_0603 11,86.844 r180 top (schematic designator C121)
C121A25 "0,1мкФ" CAP_0603 11,80.469 r180 top (schematic designator C121)
C121A26 "0,1мкФ" CAP_0603 11,74.094 r180 top (schematic designator C121)
C121A27 "0,1мкФ" CAP_0603 11,67.744 r180 top (schematic designator C121)
C121A28 "0,1мкФ" CAP_0603 11,61.344 r180 top (schematic designator C121)
C122A24 "100пФ" CAP_0603 10.925,83.869 r90 top (schematic designator C122)
C122A25 "100пФ" CAP_0603 10.925,77.494 r90 top (schematic designator C122)
C122A26 "100пФ" CAP_0603 10.925,71.119 r90 top (schematic designator C122)
C122A27 "100пФ" CAP_0603 10.925,64.769 r90 top (schematic designator C122)
C122A28 "100пФ" CAP_0603 10.925,58.369 r90 top (schematic designator C122)
C123A24 "0,1мкФ" CAP_0603 27.025,86.85 r0 top (schematic designator C123)
C123A25 "0,1мкФ" CAP_0603 27.025,80.5 r0 top (schematic designator C123)
C123A26 "0,1мкФ" CAP_0603 27.025,74.125 r0 top (schematic designator C123)
C123A27 "0,1мкФ" CAP_0603 27.025,67.725 r0 top (schematic designator C123)
C123A28 "0,1мкФ" CAP_0603 27.025,61.35 r0 top (schematic designator C123)
C124A24 "100пФ" CAP_0603 36.2,83.875 r90 top (schematic designator C124)
C124A25 "100пФ" CAP_0603 36.2,77.525 r90 top (schematic designator C124)
C124A26 "100пФ" CAP_0603 36.2,71.15 r90 top (schematic designator C124)
C124A27 "100пФ" CAP_0603 36.2,64.75 r90 top (schematic designator C124)
C124A28 "100пФ" CAP_0603 36.2,58.4 r90 top (schematic designator C124)
C125A24 "0,1мкФ" CAP_0603 31.6,81.775 r0 top (schematic designator C125)
C125A25 "0,1мкФ" CAP_0603 31.6,75.425 r0 top (schematic designator C125)
C125A26 "0,1мкФ" CAP_0603 31.6,69.05 r0 top (schematic designator C125)
C125A27 "0,1мкФ" CAP_0603 31.6,62.65 r0 top (schematic designator C125)
C125A28 "0,1мкФ" CAP_0603 31.6,56.3 r0 top (schematic designator C125)
C126A24 "100пФ" CAP_0603 28.55,85.475 r270 top (schematic designator C126)
C126A25 "100пФ" CAP_0603 28.55,79.125 r270 top (schematic designator C126)
C126A26 "100пФ" CAP_0603 28.55,72.75 r270 top (schematic designator C126)
C126A27 "100пФ" CAP_0603 28.55,66.35 r270 top (schematic designator C126)
C126A28 "100пФ" CAP_0603 28.55,59.975 r270 top (schematic designator C126)
C127A24 "0,1мкФ" CAP_0603 37.65,83.875 r90 top (schematic designator C127)
C127A25 "0,1мкФ" CAP_0603 37.65,77.525 r90 top (schematic designator C127)
C127A26 "0,1мкФ" CAP_0603 37.65,71.15 r90 top (schematic designator C127)
C127A27 "0,1мкФ" CAP_0603 37.65,64.75 r90 top (schematic designator C127)
C127A28 "0,1мкФ" CAP_0603 37.65,58.4 r90 top (schematic designator C127)
DA1 "TMR 6-2411" "TMR3 (SIP-8)" 186.85,19.905 r270 top
DA2 "TME 2405S" "TME (SIP-4)" 9.7,54.994 r180 top
DA3 "LD1117D33CTR" SOIC-8 176.475,30.4 r0 top
DA4 "LM2776DBVR" SOT-23-6 174.85,6.75 r0 top
DA5 "ADA4817-1ARDZ" "SOIC-8 EPAD" 30.95,98.8 r180 top
DA6 "TLV3501AIDBVR" SOT-23-6 21.45,99.05 r270 top
DA7A6 "LMC7101BIM5" SOT-23-5 156.725,102.5 r0 top (schematic designator DA7)
DA7A7 "LMC7101BIM5" SOT-23-5 133.825,103.05 r0 top (schematic designator DA7)
DA7A8 "LMC7101BIM5" SOT-23-5 113.95,103.025 r0 top (schematic designator DA7)
DA7A9 "LMC7101BIM5" SOT-23-5 93.075,103.1 r0 top (schematic designator DA7)
DA7A10 "LMC7101BIM5" SOT-23-5 74.63,102.67 r0 top (schematic designator DA7)
DA8A6 "L78L05ABUTR" SOT-89 161.125,107.475 r270 top (schematic designator DA8)
DA8A7 "L78L05ABUTR" SOT-89 140.85,107.325 r270 top (schematic designator DA8)
DA8A8 "L78L05ABUTR" SOT-89 120.275,107.35 r270 top (schematic designator DA8)
DA8A9 "L78L05ABUTR" SOT-89 99.725,107.25 r270 top (schematic designator DA8)
DA8A10 "L78L05ABUTR" SOT-89 80.4,105.8 r180 bottom (schematic designator DA8)
DA9A11 "SN74LVC1G3157DBV" SOT-23-6 23.725,32.275 r0 top (schematic designator DA9)
DA9A12 "SN74LVC1G3157DBV" SOT-23-6 55.5,32.275 r0 top (schematic designator DA9)
DA9A13 "SN74LVC1G3157DBV" SOT-23-6 87.3,32.275 r0 top (schematic designator DA9)
DA9A14 "SN74LVC1G3157DBV" SOT-23-6 119.05,32.275 r0 top (schematic designator DA9)
DA9A15 "SN74LVC1G3157DBV" SOT-23-6 150.825,32.275 r0 top (schematic designator DA9)
DA10A11 "LMC7101BIM5" SOT-23-5 23.725,30.375 r0 bottom (schematic designator DA10)
DA10A12 "LMC7101BIM5" SOT-23-5 55.5,30.375 r0 bottom (schematic designator DA10)
DA10A13 "LMC7101BIM5" SOT-23-5 87.3,30.375 r0 bottom (schematic designator DA10)
DA10A14 "LMC7101BIM5" SOT-23-5 119.05,30.375 r0 bottom (schematic designator DA10)
DA10A15 "LMC7101BIM5" SOT-23-5 150.825,30.375 r0 bottom (schematic designator DA10)
DA11A11 "TMR 2412" "TMR3 (SIP-8)" 37.425,19.905 r270 top (schematic designator DA11)
DA11A12 "TMR 2412" "TMR3 (SIP-8)" 69.2,19.905 r270 top (schematic designator DA11)
DA11A13 "TMR 2412" "TMR3 (SIP-8)" 100.975,19.905 r270 top (schematic designator DA11)
DA11A14 "TMR 2412" "TMR3 (SIP-8)" 132.75,19.905 r270 top (schematic designator DA11)
DA11A15 "TMR 2412" "TMR3 (SIP-8)" 164.525,19.905 r270 top (schematic designator DA11)
DA12A11 "L78L05ABUTR" SOT-89 10.64,5.025 r0 bottom (schematic designator DA12)
DA12A12 "L78L05ABUTR" SOT-89 42.425,5.025 r0 bottom (schematic designator DA12)
DA12A13 "L78L05ABUTR" SOT-89 74.2,5.025 r0 bottom (schematic designator DA12)
DA12A14 "L78L05ABUTR" SOT-89 105.975,5.025 r0 bottom (schematic designator DA12)
DA12A15 "L78L05ABUTR" SOT-89 137.75,5.025 r0 bottom (schematic designator DA12)
DA13A11 "LMC7101BIM5" SOT-23-5 23.24,8.76 r270 top (schematic designator DA13)
DA13A12 "LMC7101BIM5" SOT-23-5 55.025,8.76 r270 top (schematic designator DA13)
DA13A13 "LMC7101BIM5" SOT-23-5 86.8,8.76 r270 top (schematic designator DA13)
DA13A14 "LMC7101BIM5" SOT-23-5 118.575,8.76 r270 top (schematic designator DA13)
DA13A15 "LMC7101BIM5" SOT-23-5 150.35,8.76 r270 top (schematic designator DA13)
DA14A11 "LMC7101BIM5" SOT-23-5 18.065,25.325 r90 top (schematic designator DA14)
DA14A12 "LMC7101BIM5" SOT-23-5 49.85,25.325 r90 top (schematic designator DA14)
DA14A13 "LMC7101BIM5" SOT-23-5 81.625,25.325 r90 top (schematic designator DA14)
DA14A14 "LMC7101BIM5" SOT-23-5 113.4,25.325 r90 top (schematic designator DA14)
DA14A15 "LMC7101BIM5" SOT-23-5 145.175,25.325 r90 top (schematic designator DA14)
DA15 "LMC7101BIM5" SOT-23-5 173.009,92.987 r0 top
DA16 "LMC7101BIM5" SOT-23-5 172.996,97.8 r0 top
DA17 "L78L12ABUTR" SOT-89 188.7,76.925 r90 bottom
DA18 "TME 2405S" "TME (SIP-4)" 190.305,28.625 r0 top locked
DA19 "TPD4S009DBVR" SOT-23-6 184.375,47.626 r180 bottom
DA20A24 "LMC7101BIM5" SOT-23-5 31.425,83.6 r90 top (schematic designator DA20)
DA20A25 "LMC7101BIM5" SOT-23-5 31.425,77.275 r90 top (schematic designator DA20)
DA20A26 "LMC7101BIM5" SOT-23-5 31.425,70.9 r90 top (schematic designator DA20)
DA20A27 "LMC7101BIM5" SOT-23-5 31.425,64.5 r90 top (schematic designator DA20)
DA20A28 "LMC7101BIM5" SOT-23-5 31.425,58.125 r90 top (schematic designator DA20)
DD1 "STM32F405ZGT6" LQFP-144 104.425,69.3 r270 top
DD2 "W25Q16JVSNIQ" SOIC-8 112.75,65.775 r0 top
DD3A6 "ADUM1100BR" SOIC-8 154.825,89.2 r90 top (schematic designator DD3)
DD3A7 "ADUM1100BR" SOIC-8 134.425,89.2 r90 top (schematic designator DD3)
DD3A8 "ADUM1100BR" SOIC-8 114,89.2 r90 top (schematic designator DD3)
DD3A9 "ADUM1100BR" SOIC-8 92.75,89.2 r90 top (schematic designator DD3)
DD3A10 "ADUM1100BR" SOIC-8 72.5,89.2 r90 top (schematic designator DD3)
DD4A6 "ADUM1200CR" SOIC-8 150.175,95.2 r270 top (schematic designator DD4)
DD4A7 "ADUM1200CR" SOIC-8 129.775,95.2 r270 top (schematic designator DD4)
DD4A8 "ADUM1200CR" SOIC-8 109.35,95.2 r270 top (schematic designator DD4)
DD4A9 "ADUM1200CR" SOIC-8 88.1,95.2 r270 top (schematic designator DD4)
DD4A10 "ADUM1200CR" SOIC-8 67.85,95.2 r270 top (schematic designator DD4)
DD5A11 "ADUM1402CRW" SOIC-16W 11.195,20 r270 bottom (schematic designator DD5)
DD5A12 "ADUM1402CRW" SOIC-16W 42.98,20 r270 bottom (schematic designator DD5)
DD5A13 "ADUM1402CRW" SOIC-16W 74.755,20 r270 bottom (schematic designator DD5)
DD5A14 "ADUM1402CRW" SOIC-16W 106.53,20 r270 bottom (schematic designator DD5)
DD5A15 "ADUM1402CRW" SOIC-16W 138.305,20 r270 bottom (schematic designator DD5)
DD6 "SN74LVC1G17DBV" SOT-23-5 179.5,70.225 r180 bottom
DD7 "SN74LVC1G17DBV" SOT-23-5 179.5,75.475 r180 bottom
DD8 "SN74LVC1G17DBV" SOT-23-5 179.5,80.725 r180 bottom
DD9 "SN74LVC1G17DBV" SOT-23-5 179.5,85.975 r180 bottom
DD10 "ADUM1100BR" SOIC-8 189.325,38.025 r180 top locked
DD11 "ADM2682EBRIZ" SOIC-16IC 20.15,38.209 r180 top
DD12 "W5100S-L" LQFP-48 173.375,54.15 r180 top
GB1 "DS1092-12-N8S" DS1092-12-N8S 129.425,53.825 r90 top
L1 "BLM21PG221SN1D" IND_0805 62.175,71.9 r180 top
L2 "BLM21PG221SN1D" IND_0805 2.4,59.019 r90 bottom
L3 "BLM21PG221SN1D" IND_0805 62.175,68.1 r180 top
L4 "BLM21PG221SN1D" IND_0805 62.175,75.7 r180 top
L5 "BLM21PG221SN1D" IND_0805 173.475,59.95 r270 bottom
L6 "BLM21PG221SN1D" IND_0805 172.275,55.651 r0 bottom
L7 "BLM21PG221SN1D" IND_0805 166.575,64.05 r0 bottom
R1 "0" RES_0805 62.175,73.8 r180 top
R2 "0" RES_0805 4.3,59.019 r90 bottom
R3 "0" RES_0805 62.175,70 r180 top
R4 "0" RES_0805 62.175,77.6 r180 top
R5 "10к" RES_0603 87.85,61.25 r90 bottom
R6 "200" RES_0603 81.75,60.725 r180 top
R7 "200" RES_0603 81.75,58.825 r180 top
R8 "200" RES_0603 81.75,56.925 r180 top
R9 "10к" RES_0603 108.7,64.3 r90 top
R10 "0" RES_0603 108.7,67.2 r90 top
R11 "2М" 3224W 36.8,100.7 r180 top
R12 "0" RES_0603 33.025,102.55 r0 top
R13 "NA" RES_0603 34.625,104 r180 top
R14 "5,1к" RES_0603 23,101.975 r180 top
R15 "10к" RES_0603 21.4,103.475 r0 top
R16 "10к" RES_0603 20.075,101.975 r180 top
R17 "10к" RES_0603 21.4,100.475 r0 top
R18 "10к" 3224W 13.875,96.275 r270 top
R19A2 "10к" RES_0603 55.375,101.375 r90 top (schematic designator R19)
R19A3 "10к" RES_0603 52.475,101.375 r90 top (schematic designator R19)
R19A4 "10к" RES_0603 49.575,101.375 r90 top (schematic designator R19)
R19A5 "10к" RES_0603 46.675,101.375 r90 top (schematic designator R19)
R20A2 "10к" RES_0603 53.925,102.975 r270 top (schematic designator R20)
R20A3 "10к" RES_0603 51.025,102.975 r270 top (schematic designator R20)
R20A4 "10к" RES_0603 48.125,102.975 r270 top (schematic designator R20)
R20A5 "10к" RES_0603 45.225,102.975 r270 top (schematic designator R20)
R21A6 "200" RES_0603 151.85,85.75 r90 top (schematic designator R21)
R21A7 "200" RES_0603 131.45,85.75 r90 top (schematic designator R21)
R21A8 "200" RES_0603 111.025,85.75 r90 top (schematic designator R21)
R21A9 "200" RES_0603 89.775,85.75 r90 top (schematic designator R21)
R21A10 "200" RES_0603 71.025,85.825 r180 top (schematic designator R21)
R22A6 "10к" RES_0603 158.1,97.775 r90 top (schematic designator R22)
R22A7 "10к" RES_0603 137.725,97.8 r90 top (schematic designator R22)
R22A8 "10к" RES_0603 117.125,97.625 r90 top (schematic designator R22)
R22A9 "10к" RES_0603 95.95,98 r90 top (schematic designator R22)
R22A10 "10к" RES_0603 75.05,97.425 r90 top (schematic designator R22)
R23A6 "10к" RES_0603 148.7,99.25 r270 top (schematic designator R23)
R23A7 "10к" RES_0603 128.325,99.125 r270 top (schematic designator R23)
R23A8 "10к" RES_0603 107.9,99.225 r270 top (schematic designator R23)
R23A9 "10к" RES_0603 86.55,99.6 r270 top (schematic designator R23)
R23A10 "10к" RES_0603 68,98.725 r90 bottom (schematic designator R23)
R24A6 "10к" RES_0603 147.225,99.25 r270 top (schematic designator R24)
R24A7 "10к" RES_0603 126.875,99.125 r270 top (schematic designator R24)
R24A8 "10к" RES_0603 106.45,99.225 r270 top (schematic designator R24)
R24A9 "10к" RES_0603 85.1,99.6 r270 top (schematic designator R24)
R24A10 "10к" RES_0603 66.55,98.725 r90 bottom (schematic designator R24)
R25A11 "10к" RES_0603 26.025,33.65 r180 bottom (schematic designator R25)
R25A12 "10к" RES_0603 53.3,33.65 r0 bottom (schematic designator R25)
R25A13 "10к" RES_0603 89.6,33.575 r180 bottom (schematic designator R25)
R25A14 "10к" RES_0603 116.875,33.575 r0 bottom (schematic designator R25)
R25A15 "10к" RES_0603 148.575,33.575 r0 bottom (schematic designator R25)
R26A11 "6,49к" RES_0603 25.865,25.625 r90 top (schematic designator R26)
R26A12 "6,49к" RES_0603 57.65,25.625 r90 top (schematic designator R26)
R26A13 "6,49к" RES_0603 89.425,25.625 r90 top (schematic designator R26)
R26A14 "6,49к" RES_0603 121.2,25.625 r90 top (schematic designator R26)
R26A15 "6,49к" RES_0603 152.975,25.625 r90 top (schematic designator R26)
R27A11 "15к" RES_0603 15.465,8.5 r270 top (schematic designator R27)
R27A12 "15к" RES_0603 47.25,8.5 r270 top (schematic designator R27)
R27A13 "15к" RES_0603 79.025,8.5 r270 top (schematic designator R27)
R27A14 "15к" RES_0603 110.8,8.5 r270 top (schematic designator R27)
R27A15 "15к" RES_0603 142.575,8.5 r270 top (schematic designator R27)
R28A11 "10к" RES_0603 27.315,25.625 r90 top (schematic designator R28)
R28A12 "10к" RES_0603 59.1,25.625 r90 top (schematic designator R28)
R28A13 "10к" RES_0603 90.875,25.625 r90 top (schematic designator R28)
R28A14 "10к" RES_0603 122.65,25.625 r90 top (schematic designator R28)
R28A15 "10к" RES_0603 154.425,25.625 r90 top (schematic designator R28)
R29A11 "10к" RES_0603 14.015,8.5 r270 top (schematic designator R29)
R29A12 "10к" RES_0603 45.8,8.5 r270 top (schematic designator R29)
R29A13 "10к" RES_0603 77.575,8.5 r270 top (schematic designator R29)
R29A14 "10к" RES_0603 109.35,8.5 r270 top (schematic designator R29)
R29A15 "10к" RES_0603 141.125,8.5 r270 top (schematic designator R29)
R30A11 "10к" RES_0603 19.99,10.575 r180 top (schematic designator R30)
R30A12 "10к" RES_0603 51.775,10.575 r180 top (schematic designator R30)
R30A13 "10к" RES_0603 83.55,10.575 r180 top (schematic designator R30)
R30A14 "10к" RES_0603 115.325,10.575 r180 top (schematic designator R30)
R30A15 "10к" RES_0603 147.1,10.575 r180 top (schematic designator R30)
R31A11 "10к" RES_0603 21.315,23.55 r0 top (schematic designator R31)
R31A12 "10к" RES_0603 53.1,23.55 r0 top (schematic designator R31)
R31A13 "10к" RES_0603 84.875,23.55 r0 top (schematic designator R31)
R31A14 "10к" RES_0603 116.65,23.55 r0 top (schematic designator R31)
R31A15 "10к" RES_0603 148.425,23.55 r0 top (schematic designator R31)
R32A11 "10к" RES_0603 27.565,8.5 r270 top (schematic designator R32)
R32A12 "10к" RES_0603 59.35,8.5 r270 top (schematic designator R32)
R32A13 "10к" RES_0603 91.125,8.5 r270 top (schematic designator R32)
R32A14 "10к" RES_0603 122.9,8.5 r270 top (schematic designator R32)
R32A15 "10к" RES_0603 154.675,8.5 r270 top (schematic designator R32)
R33A11 "10к" RES_0603 13.731,25.625 r90 top (schematic designator R33)
R33A12 "10к" RES_0603 45.516,25.625 r90 top (schematic designator R33)
R33A13 "10к" RES_0603 77.3,25.625 r90 top (schematic designator R33)
R33A14 "10к" RES_0603 109.075,25.625 r90 top (schematic designator R33)
R33A15 "10к" RES_0603 140.85,25.625 r90 top (schematic designator R33)
R34A11 "24,9к" RES_0603 19.915,6.9 r90 top (schematic designator R34)
R34A12 "24,9к" RES_0603 51.7,6.925 r90 top (schematic designator R34)
R34A13 "24,9к" RES_0603 83.475,6.9 r90 top (schematic designator R34)
R34A14 "24,9к" RES_0603 115.25,6.9 r90 top (schematic designator R34)
R34A15 "24,9к" RES_0603 147.025,6.9 r90 top (schematic designator R34)
R35A11 "16,5к" RES_0603 21.39,25.625 r90 top (schematic designator R35)
R35A12 "16,5к" RES_0603 53.175,25.625 r90 top (schematic designator R35)
R35A13 "16,5к" RES_0603 84.95,25.625 r90 top (schematic designator R35)
R35A14 "16,5к" RES_0603 116.725,25.625 r90 top (schematic designator R35)
R35A15 "16,5к" RES_0603 148.5,25.625 r90 top (schematic designator R35)
R36A11 "10к" RES_0603 19.915,13.275 r90 top (schematic designator R36)
R36A12 "10к" RES_0603 51.7,13.275 r90 top (schematic designator R36)
R36A13 "10к" RES_0603 83.475,13.275 r90 top (schematic designator R36)
R36A14 "10к" RES_0603 115.25,13.275 r90 top (schematic designator R36)
R36A15 "10к" RES_0603 147.025,13.275 r90 top (schematic designator R36)
R37A11 "10к" RES_0603 18.465,13.275 r90 top (schematic designator R37)
R37A12 "10к" RES_0603 50.25,13.275 r90 top (schematic designator R37)
R37A13 "10к" RES_0603 82.025,13.275 r90 top (schematic designator R37)
R37A14 "10к" RES_0603 113.8,13.275 r90 top (schematic designator R37)
R37A15 "10к" RES_0603 145.575,13.275 r90 top (schematic designator R37)
R38A11 "24,9к" RES_0603 24.665,6.9 r90 top (schematic designator R38)
R38A12 "24,9к" RES_0603 56.45,6.9 r90 top (schematic designator R38)
R38A13 "24,9к" RES_0603 88.225,6.9 r90 top (schematic designator R38)
R38A14 "24,9к" RES_0603 120,6.9 r90 top (schematic designator R38)
R38A15 "24,9к" RES_0603 151.775,6.9 r90 top (schematic designator R38)
R39A11 "16,5к" RES_0603 16.631,25.625 r90 top (schematic designator R39)
R39A12 "16,5к" RES_0603 48.416,25.625 r90 top (schematic designator R39)
R39A13 "16,5к" RES_0603 80.2,25.625 r90 top (schematic designator R39)
R39A14 "16,5к" RES_0603 111.975,25.625 r90 top (schematic designator R39)
R39A15 "16,5к" RES_0603 143.75,25.625 r90 top (schematic designator R39)
R40A11 "10к" RES_0603 16.625,28.525 r90 top (schematic designator R40)
R40A12 "10к" RES_0603 48.425,28.525 r90 top (schematic designator R40)
R40A13 "10к" RES_0603 80.2,28.525 r90 top (schematic designator R40)
R40A14 "10к" RES_0603 111.975,28.525 r90 top (schematic designator R40)
R40A15 "10к" RES_0603 143.75,28.525 r90 top (schematic designator R40)
R41 "10к" RES_0603 171.771,89.65 r0 top
R42 "12к" RES_0603 171.771,94.45 r0 top
R43 "10к" RES_0603 174.671,94.45 r0 top
R44 "200" RES_0603 170.946,99.218 r90 top
R45 "10к" RES_0603 176.325,99.218 r90 top
R46 "10к" RES_0603 170.946,104.268 r270 top
R47 "10" RES_1210 179.125,103.243 r180 top
R48 "200" RES_0603 182.825,79.75 r180 top
R49 "200" RES_0603 182.825,83.05 r180 top
R50 "200" RES_0603 182.825,86.35 r180 top
R51 "200" RES_0603 182.825,91.1 r180 top
R52 "200" RES_0603 182.825,95.7 r180 top
R53 "200" RES_0603 182.825,100.225 r180 top
R54 "1к" RES_0603 181.65,71.725 r180 bottom
R55 "1к" RES_0603 181.65,76.975 r180 bottom
R56 "1к" RES_0603 181.65,82.225 r180 bottom
R57 "10к" RES_0603 178.725,71.725 r180 bottom
R58 "10к" RES_0603 178.725,76.975 r180 bottom
R59 "10к" RES_0603 178.725,82.225 r180 bottom
R60 "200" RES_0603 182.825,76.5 r180 top
R61 "1к" RES_0603 181.65,87.475 r180 bottom
R62 "10к" RES_0603 178.725,87.475 r180 bottom
R63 "10к" RES_0603 191.45,39.175 r270 top
R64 "120" RES_0603 6.725,43.444 r270 top
R65 "49,9" RES_0603 181.375,50.229 r180 top
R66 "49,9" RES_0603 181.375,54.728 r180 top
R67 "49,9" RES_0603 181.375,58.475 r180 top
R68 "49,9" RES_0603 181.375,62.976 r180 top
R69 "3,3" RES_0603 179.775,51.727 r0 top
R70 "3,3" RES_0603 179.775,59.975 r0 top
R71 "1к" RES_0603 181.375,68.163 r180 top
R72 "3,3" RES_0603 179.775,53.228 r0 top
R73 "3,3" RES_0603 179.775,61.476 r0 top
R74 "1к" RES_0603 181.375,66.663 r180 top
R75 "300" RES_0603 176.025,68.163 r0 top
R76 "1М" RES_0603 172.675,64.35 r180 top
R77 "12к" RES_0603 177.625,66.663 r180 top
R78 "0" RES_0603 169.375,66.626 r90 top
R79 "10к" RES_0603 172.075,50.2 r0 top
R80A24 "15к" RES_0603 8.025,85.469 r270 top (schematic designator R80)
R80A25 "15к" RES_0603 8.025,79.094 r270 top (schematic designator R80)
R80A26 "15к" RES_0603 8.025,72.719 r270 top (schematic designator R80)
R80A27 "15к" RES_0603 8.025,66.369 r270 top (schematic designator R80)
R80A28 "15к" RES_0603 8.025,59.969 r270 top (schematic designator R80)
R81A24 "10к" RES_0603 9.475,85.469 r270 top (schematic designator R81)
R81A25 "10к" RES_0603 9.475,79.094 r270 top (schematic designator R81)
R81A26 "10к" RES_0603 9.475,72.719 r270 top (schematic designator R81)
R81A27 "10к" RES_0603 9.475,66.369 r270 top (schematic designator R81)
R81A28 "10к" RES_0603 9.475,59.969 r270 top (schematic designator R81)
R82A24 "10к" RES_0603 34.675,81.775 r0 top (schematic designator R82)
R82A25 "10к" RES_0603 34.675,75.425 r0 top (schematic designator R82)
R82A26 "10к" RES_0603 34.675,69.05 r0 top (schematic designator R82)
R82A27 "10к" RES_0603 34.675,62.644 r0 top (schematic designator R82)
R82A28 "10к" RES_0603 34.675,56.294 r0 top (schematic designator R82)
R83A24 "10к" RES_0603 27.1,83.875 r90 top (schematic designator R83)
R83A25 "10к" RES_0603 27.1,77.525 r90 top (schematic designator R83)
R83A26 "10к" RES_0603 27.1,71.15 r90 top (schematic designator R83)
R83A27 "10к" RES_0603 27.1,64.75 r90 top (schematic designator R83)
R83A28 "10к" RES_0603 27.1,58.375 r90 top (schematic designator R83)
R84A24 "16,5к" RES_0603 34.75,83.875 r90 top (schematic designator R84)
R84A25 "16,5к" RES_0603 34.75,77.525 r90 top (schematic designator R84)
R84A26 "16,5к" RES_0603 34.75,71.15 r90 top (schematic designator R84)
R84A27 "16,5к" RES_0603 34.75,64.75 r90 top (schematic designator R84)
R84A28 "16,5к" RES_0603 34.75,58.4 r90 top (schematic designator R84)
R85A24 "16,5к" RES_0603 30,83.875 r90 top (schematic designator R85)
R85A25 "16,5к" RES_0603 30,77.525 r90 top (schematic designator R85)
R85A26 "16,5к" RES_0603 30,71.15 r90 top (schematic designator R85)
R85A27 "16,5к" RES_0603 30,64.75 r90 top (schematic designator R85)
R85A28 "16,5к" RES_0603 30,58.375 r90 top (schematic designator R85)
R86A24 "10к" RES_0603 39.1,85.475 r270 top (schematic designator R86)
R86A25 "10к" RES_0603 39.1,79.125 r270 top (schematic designator R86)
R86A26 "10к" RES_0603 39.1,72.75 r270 top (schematic designator R86)
R86A27 "10к" RES_0603 39.1,66.35 r270 top (schematic designator R86)
R86A28 "10к" RES_0603 39.1,60 r270 top (schematic designator R86)
U1A6 "TLP291(GB-TP,SE" 11-3C1 151.85,89.025 r90 top (schematic designator U1)
U1A7 "TLP291(GB-TP,SE" 11-3C1 131.45,89.025 r90 top (schematic designator U1)
U1A8 "TLP291(GB-TP,SE" 11-3C1 111.025,89.025 r90 top (schematic designator U1)
U1A9 "TLP291(GB-TP,SE" 11-3C1 89.775,89.025 r90 top (schematic designator U1)
U1A10 "TLP291(GB-TP,SE" 11-3C1 69.525,89.025 r90 top (schematic designator U1)
U2A11 "ACPL-C87A-500E" SSO-8 30.115,21.675 r270 top (schematic designator U2)
U2A12 "ACPL-C87A-500E" SSO-8 61.9,21.675 r270 top (schematic designator U2)
U2A13 "ACPL-C87A-500E" SSO-8 93.675,21.675 r270 top (schematic designator U2)
U2A14 "ACPL-C87A-500E" SSO-8 125.45,21.675 r270 top (schematic designator U2)
U2A15 "ACPL-C87A-500E" SSO-8 157.225,21.675 r270 top (schematic designator U2)
U3A11 "ACPL-C87A-500E" SSO-8 11.19,10.925 r90 top (schematic designator U3)
U3A12 "ACPL-C87A-500E" SSO-8 42.975,10.925 r90 top (schematic designator U3)
U3A13 "ACPL-C87A-500E" SSO-8 74.75,10.925 r90 top (schematic designator U3)
U3A14 "ACPL-C87A-500E" SSO-8 106.525,10.925 r90 top (schematic designator U3)
U3A15 "ACPL-C87A-500E" SSO-8 138.3,10.925 r90 top (schematic designator U3)
U4 "TLP291(GB-TP,SE" 11-3C1 185.1,79.775 r0 top
U5 "TLP291(GB-TP,SE" 11-3C1 185.1,83.075 r0 top
U6 "TLP291(GB-TP,SE" 11-3C1 185.1,86.375 r0 top
U7 "TLP127" 11-4C1 185.1,91.05 r0 top
U8 "TLP127" 11-4C1 185.1,95.65 r0 top
U9 "TLP127" 11-4C1 185.1,100.225 r0 top
U10 "TLP291(GB-TP,SE" 11-3C1 185.1,76.475 r0 top
U11A24 "ACPL-C87A-500E" SSO-8 13.35,86.844 r0 top (schematic designator U11)
U11A25 "ACPL-C87A-500E" SSO-8 13.35,80.469 r0 top (schematic designator U11)
U11A26 "ACPL-C87A-500E" SSO-8 13.35,74.094 r0 top (schematic designator U11)
U11A27 "ACPL-C87A-500E" SSO-8 13.35,67.719 r0 top (schematic designator U11)
U11A28 "ACPL-C87A-500E" SSO-8 13.35,61.344 r0 top (schematic designator U11)
VD1 "KP-2012MGC" LED_0805 78.55,60.725 r180 top
VD2 "KP-2012SYC" LED_0805 78.55,58.825 r180 top
VD3 "KP-2012EC" LED_0805 78.55,56.925 r180 top
VT1 "AO3400A" SOT-23-3 172.45,102.618 r90 top
XP1 "B2B-EH-A" B2B-EH-A 37.1,107.7 r180 top
XP2 "B8B-PHDSS" B8B-PHDSS 53.575,106.375 r0 top
XP3 "B10B-PHDSS" B10B-PHDSS 3.55,78.219 r90 top
XP4 "B2P-VH" B2P-VH 193.35,15.35 r0 top
XP5 "PLD-6" PLD-6 110.77,45.835 r0 top
XP6A6 "B8B-PHDSS" B8B-PHDSS 154.825,106.35 r0 top (schematic designator XP6)
XP6A7 "B8B-PHDSS" B8B-PHDSS 134.1,106.375 r0 top (schematic designator XP6)
XP6A8 "B8B-PHDSS" B8B-PHDSS 113.7,106.375 r0 top (schematic designator XP6)
XP6A9 "B8B-PHDSS" B8B-PHDSS 93.35,106.375 r0 top (schematic designator XP6)
XP6A10 "B8B-PHDSS" B8B-PHDSS 70.75,106.375 r0 top (schematic designator XP6)
XP7A11 "B8B-PHDSS" B8B-PHDSS 17.665,3.625 r180 top (schematic designator XP7)
XP7A12 "B8B-PHDSS" B8B-PHDSS 49.45,3.625 r180 top (schematic designator XP7)
XP7A13 "B8B-PHDSS" B8B-PHDSS 81.225,3.625 r180 top (schematic designator XP7)
XP7A14 "B8B-PHDSS" B8B-PHDSS 113,3.625 r180 top (schematic designator XP7)
XP7A15 "B8B-PHDSS" B8B-PHDSS 144.775,3.625 r180 top (schematic designator XP7)
XP8 "B2B-EH-A" B2B-EH-A 175.9,107.7 r180 top
XP9 "B8B-PHDSS" B8B-PHDSS 196.375,80.3 r270 top
XP10 "B8B-PHDSS" B8B-PHDSS 196.375,91.85 r270 top
XP11 "B8B-PHDSS" B8B-PHDSS 196.375,68.75 r270 top
XP12 "B2B-EH-A" B2B-EH-A 187.325,107.7 r180 top
XP13 "B3B-EH-A" B3B-EH-A 197.65,37.075 r90 top locked
XP14 "B3B-EH-A" B3B-EH-A 2.35,45.044 r270 top
XS1 "LPJD0012BENL" LPJD0012BENL 186.815,51.857 r90 top
ZQ1 "16МГц" NX2520SA 91.575,74.725 r0 top
ZQ2 "32,768кГц" NX3215SA 102.3,77.25 r270 top
ZQ3 "25МГц" 7M 172.775,66.151 r90 top

## Footprints (in the part's own frame and the unit in brackets; to place one, negate y for a bottom-side part, rotate by r counter-clockwise, add the part's x,y. Pads: shape width x height; smd on the part's side, far side on the other; paste and mask are expansions set on the pad)
7M [mm]
  rect 1.4x1.2 smd: 1(0,0) 2(2.2,0.025) 3(2.2,1.725) 4(0,1.725)
  silkscreen extent -0.92,-0.82 3.13,2.55, body extent -0.55,-0.45 2.75,2.15, height 0.8
11-3C1 [mm]
  rect 1.5x0.8 smd: 1(0,0) 2(0,-1.275) 3(6.4,-1.275) 4(6.4,-0.025)
  silkscreen extent -0.12,-1.95 5.25,1, body extent -0.28,-1.95 6.73,0.65, height 2.2
11-4C1 [mm]
  rect 1.5x0.8 smd: 1(0,0) 3(0,-2.55) 4(6.4,-2.55) 6(6.4,-0.025)
  silkscreen extent -0.12,-3.17 5.25,1, body extent -0.15,-3.07 6.65,0.52, height 2.55
3224W [mm]
  rect 2.2x1.3 smd: 1(0,0) 3(0,2.525)
  rect 2.2x2 smd: 2(-3.45,1.3)
  silkscreen extent -3.72,-1.12 0.25,3.72, body extent -3.72,-1.12 0.23,3.71, height 5.29
B2B-EH-A [mm]
  rect 1.8x1.8 hole 0.965: 1(0,0)
  round 1.8 hole 1: 2(2.5,0)
  silkscreen extent -2.45,-2.2 5.05,2.6, body extent -2.45,-2.2 5.05,1.6, height 6
B2P-VH [mm]
  rect 2.8x2.8 hole 1.8: 1(0,0)
  round 2.8 hole 1.8: 2(3.96,0)
  silkscreen extent -1.92,-4.75 5.92,6.5, body extent -1.93,-4.75 5.93,3.75, height 10.9
B3B-EH-A [mm]
  rect 1.8x1.8 hole 0.965: 1(0,0)
  round 1.8 hole 1: 2(2.5,0) 3(5,0)
  silkscreen extent -2.5,-2.25 7.5,2.5, body extent -2.5,-2.25 7.5,1.55, height 6